# EAGLE board GBADVI (EAGLE 9.6.2)
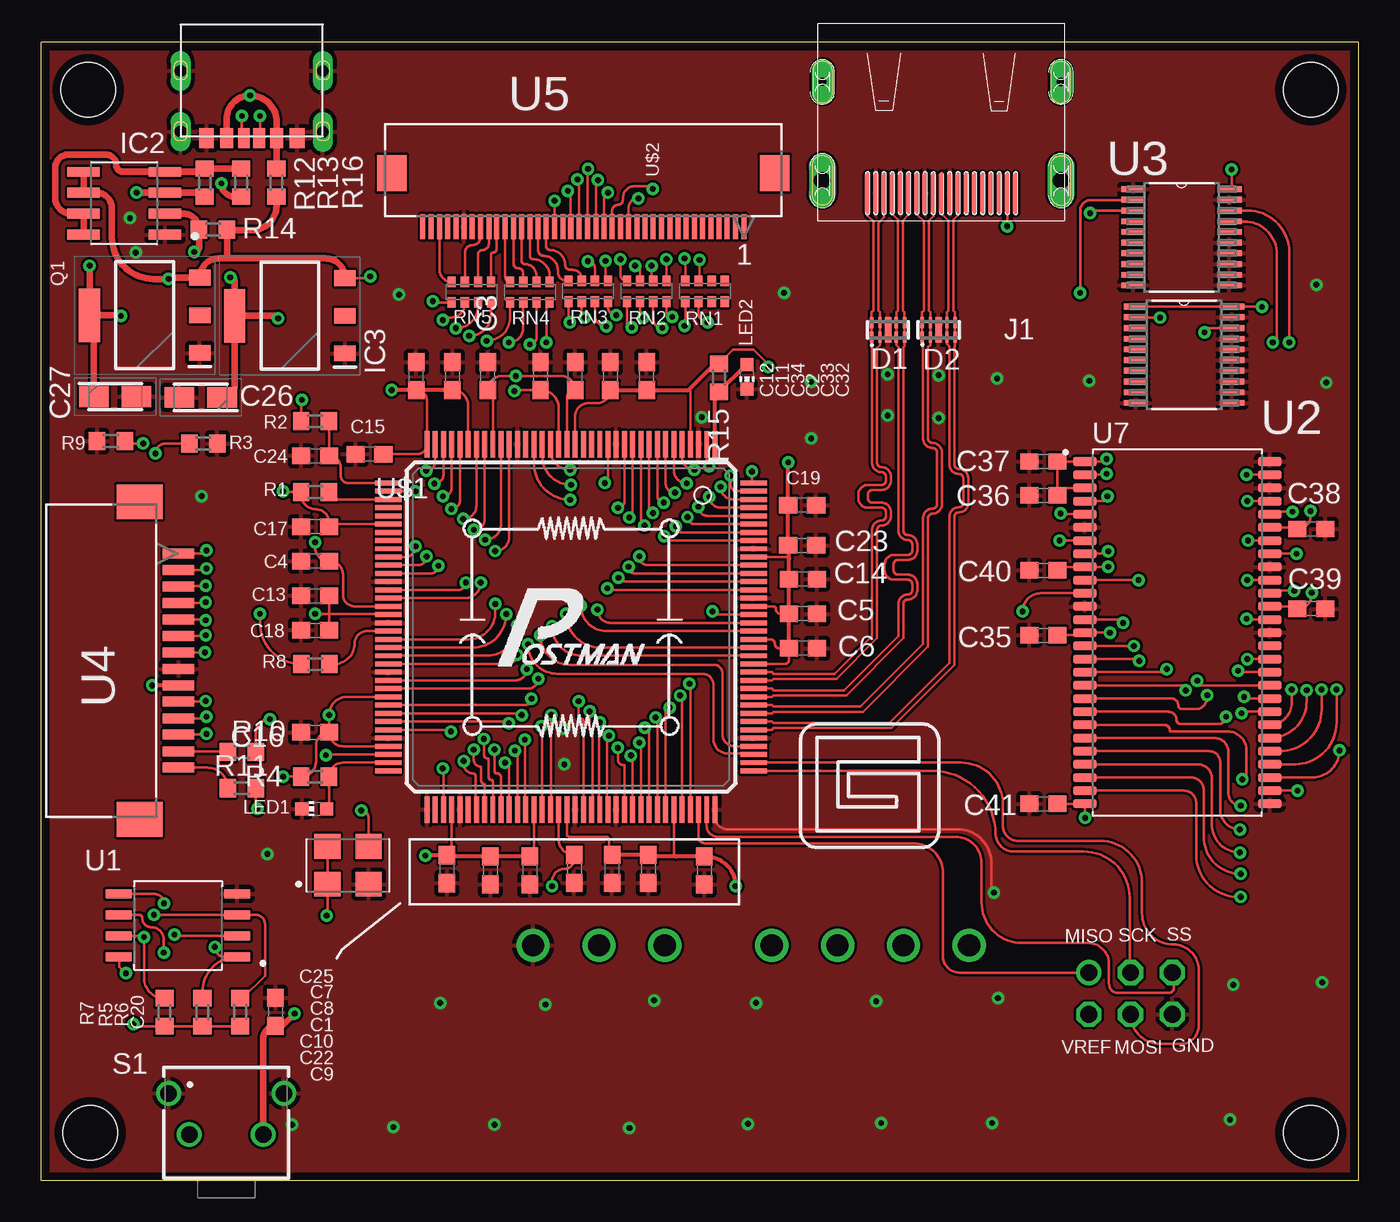
[diagram p0: board, top side]
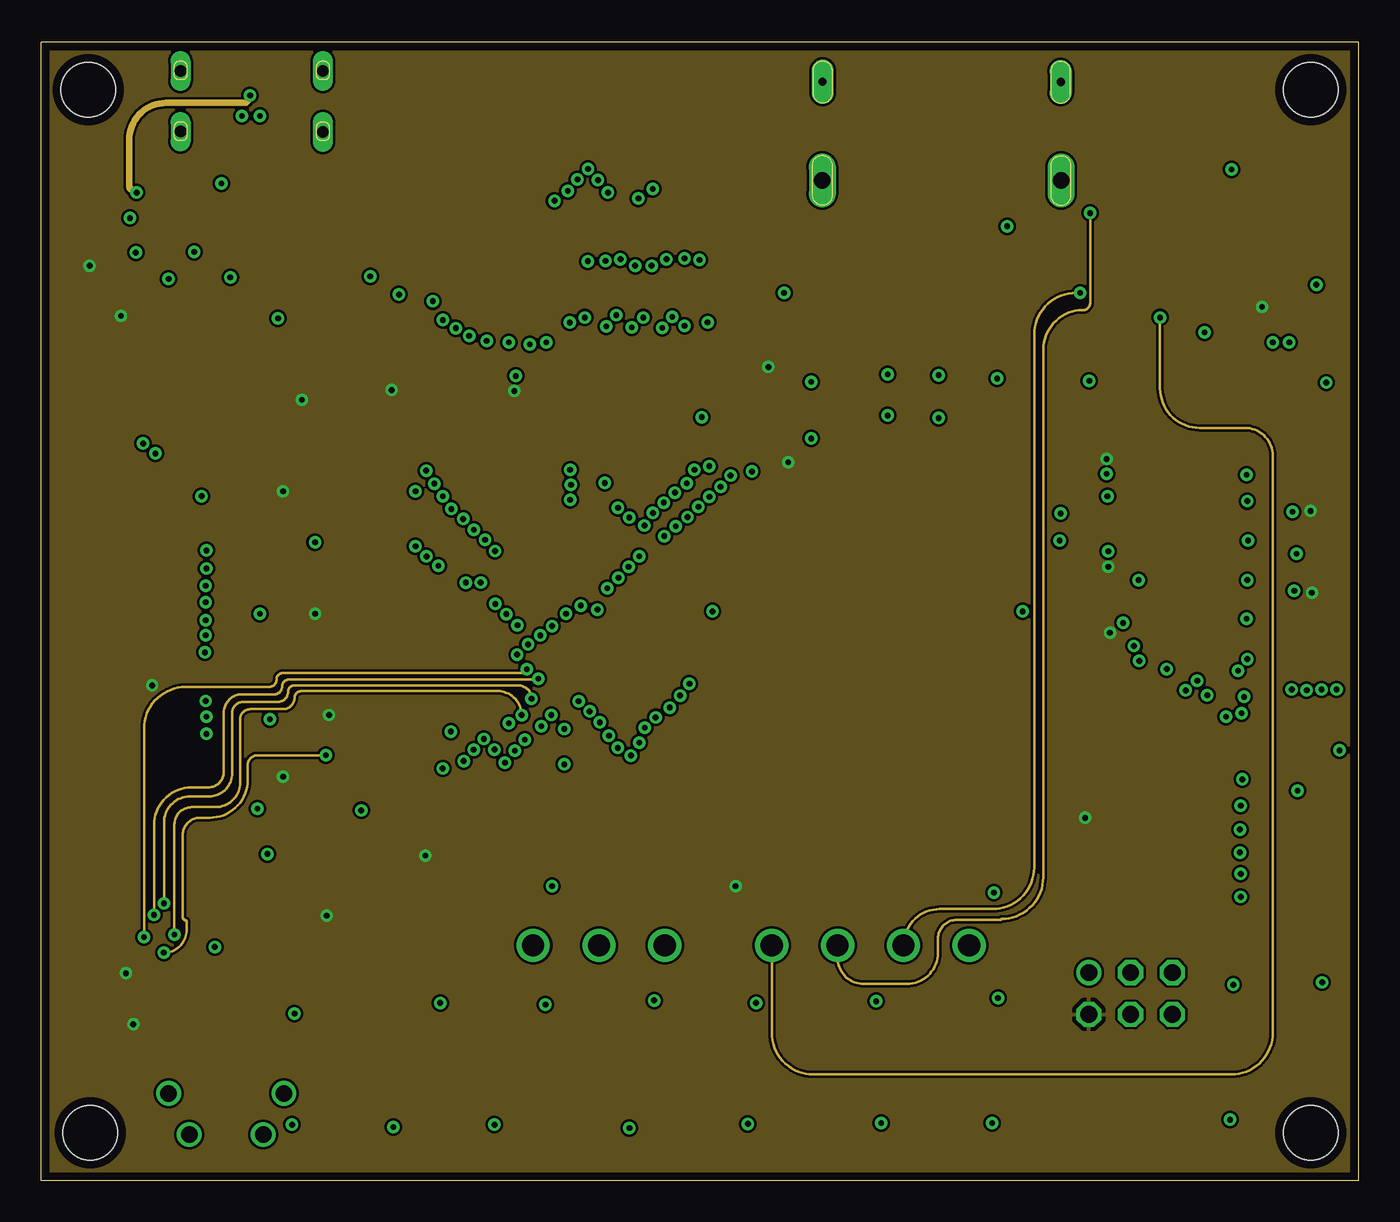
[diagram p1: board, inner layer Route2]
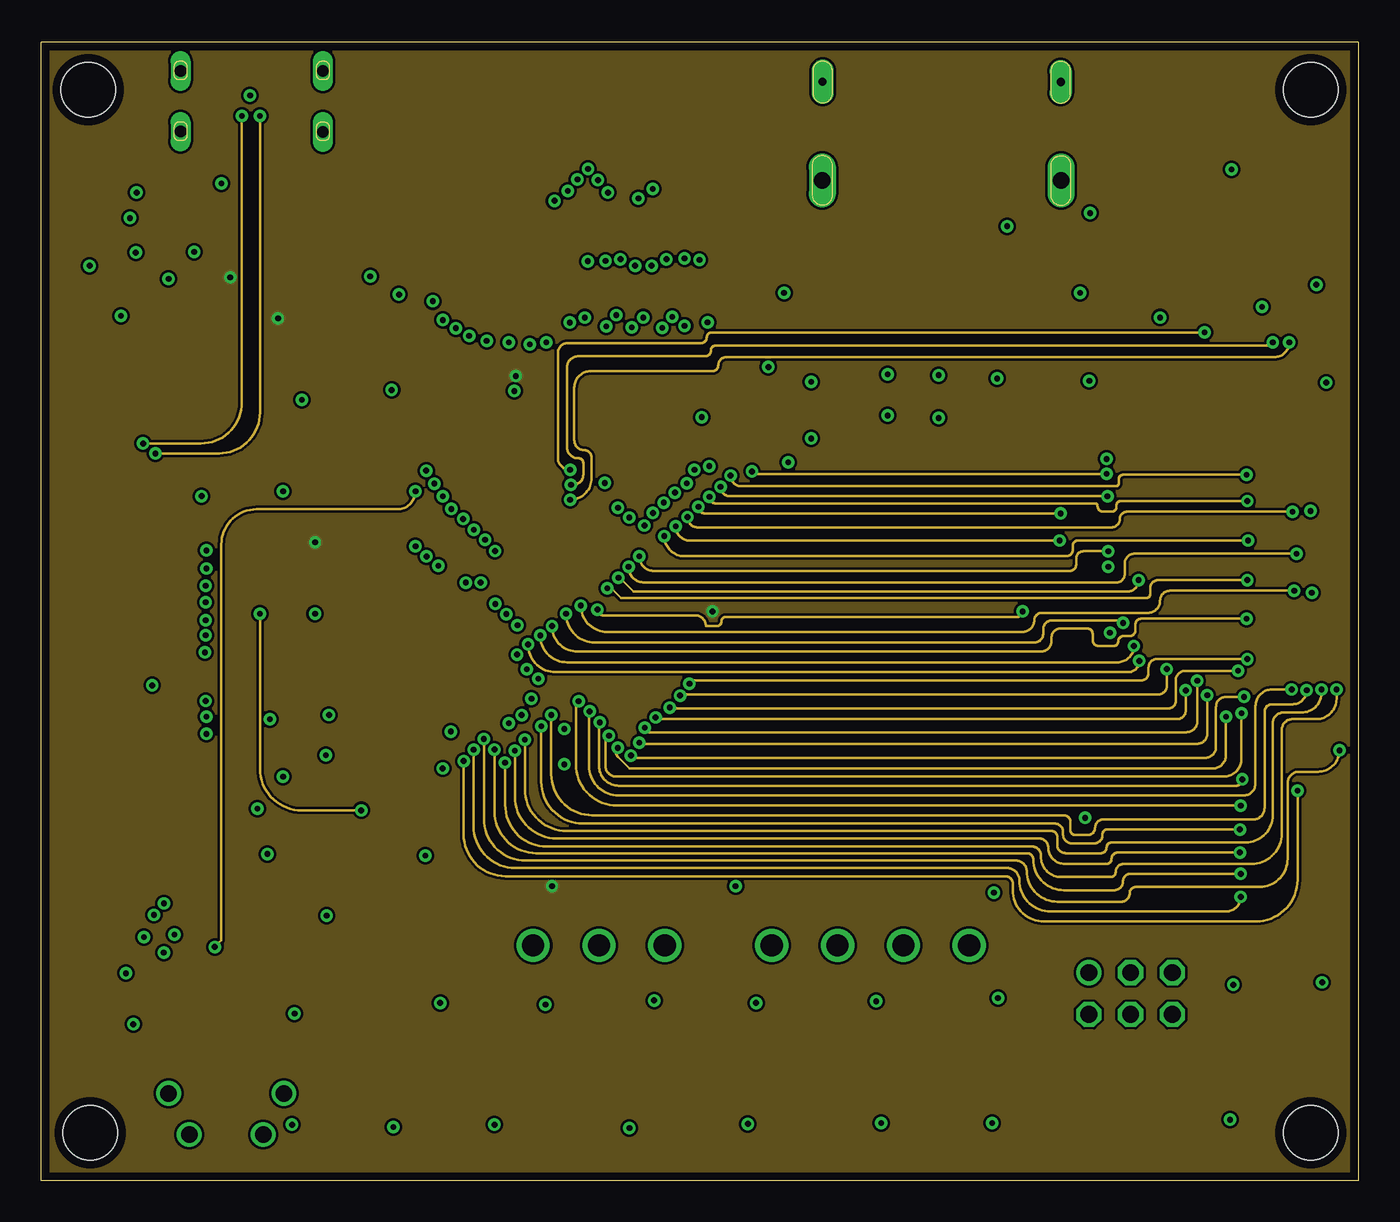
[diagram p2: board, inner layer Route15]
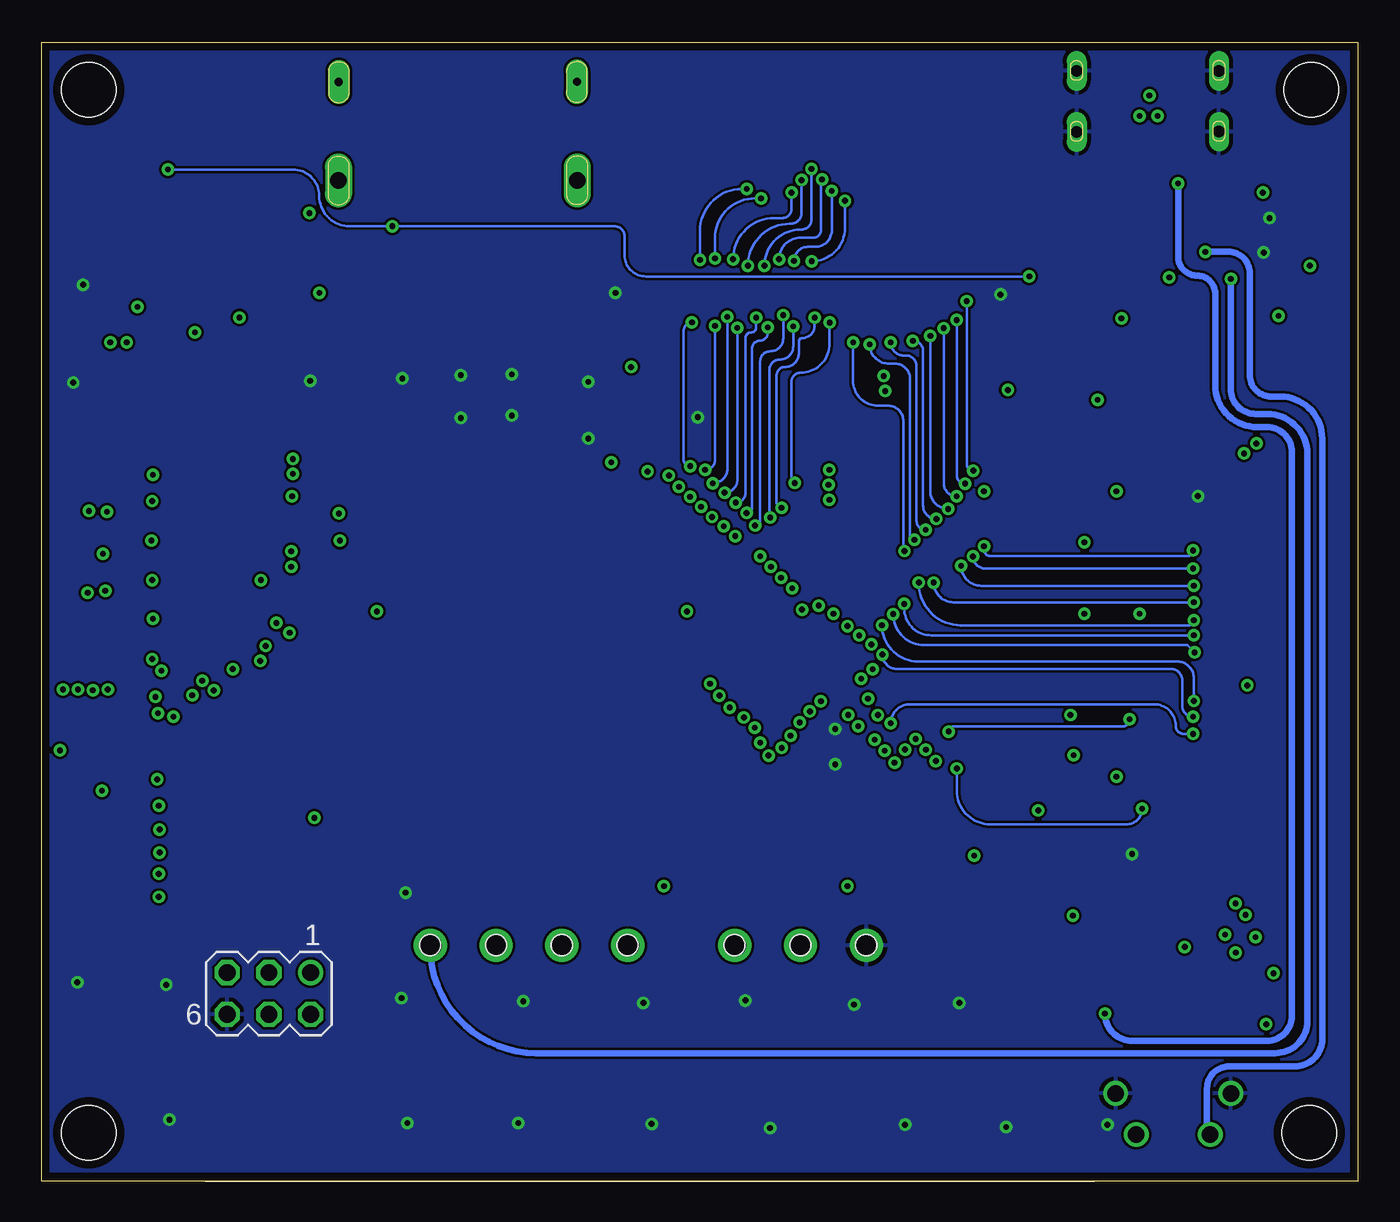
[diagram p3: board, bottom side, seen from below]

Size 80.05 x 69.2 mm. Coordinates in mm from the lower left corner, seen from the top.
Outline: 80.05,69.2 80.05,0 0,0 0,69.2 80.05,69.2
Copper layers (1+2*15+16): Top 0.035mm / dielectric 10mil / Route2 0.035mm / dielectric 40mil / Route15 0.035mm / dielectric 10mil / Bottom 0.035mm
Design rules "default *": minimum track width 6mil, minimum drill 0.35mm, track to track 6mil, track to pad 6mil, pad to pad 6mil, via to via 6mil, smd to smd 6mil, copper to edge 20mil, drill to drill 5mil, minimum pad ring 10mil, minimum via ring 8mil, stop-mask expansion 4mil, vias tented up to drill 35mil, thermal gap 10mil

## Footprints (pad centres in the part's own frame; a part is rotated, then mirrored left to right if it is on the bottom)
C0603 = smd 1.1 x 1: 1 -0.85,0; 2 0.85,0
CAPPM3216X180N = smd 1.8 x 1.25: 1 -1.3,0; 2 1.3,0
RCLAMP0524P = smd 0.2 x 0.675: 1 -1.5,-0.438; 2 -1,-0.438; 4 0,-0.438; 5 0.5,-0.438; 6 0.5,0.438; 7 0,0.438; 9 -1,0.438; 10 -1.5,0.438 | smd 0.4 x 0.775: 3 -0.5,-0.388; 8 -0.5,0.388
SOT229P700X180-4N = smd 1.3 x 0.95: 1 -3.35,2.29; 2 -3.35,0; 3 -3.35,-2.29 | smd 1.3 x 3.25: 4 3.35,0
HDMI-001 = smd 0.3 x 2.6: P$1 -0.07,0.08; P$2 -0.58,0.08; P$3 -1.07,0.08; P$4 -1.57,0.08; P$5 -2.07,0.08; P$6 -2.57,0.08; P$7 -3.07,0.08; P$8 -3.57,0.08; P$9 -4.07,0.08; P$10 -4.57,0.08; P$11 -5.07,0.08; P$12 -5.57,0.08; P$13 -6.07,0.08; P$14 -6.57,0.08; P$15 -7.07,0.08; P$16 -7.57,0.08; P$17 -8.07,0.08; P$18 -8.57,0.08; P$19 -9.07,0.09 | drill 1 pad 1.65 long: P$20 -11.83,-0.7; P$21 2.68,-0.7 | drill 0.5 pad 1.35 long: P$22 -11.82,-6.68; P$23 2.66,-6.69
CHIP-LED0603 = smd 0.8 x 0.8: A 0,-0.75; C 0,0.75
MA03-2 = drill 1.016: 1 -2.54,-1.27 | drill 1.016 octagon: 2 -2.54,1.27; 3 0,-1.27; 4 0,1.27; 5 2.54,-1.27; 6 2.54,1.27
SOIC127P600X175-8N = smd 1.97 x 0.6: 1 -2.475,1.905; 2 -2.475,0.635; 3 -2.475,-0.635; 4 -2.475,-1.905; 5 2.475,-1.905; 6 2.475,-0.635; 7 2.475,0.635; 8 2.475,1.905
R0603 = smd 1 x 1.1: 1 -0.85,0; 2 0.85,0
0603-ARV = smd 0.5 x 0.65: 1 -1.2,-0.625; 2 -0.4,-0.625; 3 0.4,-0.625; 4 1.2,-0.625; 5 1.2,0.625; 6 0.4,0.625; 7 -0.4,0.625; 8 -1.2,0.625
4312560387X6 = drill 1: 1 -3.5,1.25; 2 -2.25,-1.25; 3 2.25,-1.25; 4 3.5,1.25
SOIC127P790X216-8N = smd 1.61 x 0.58: 1 -3.605,1.905; 2 -3.605,0.635; 3 -3.605,-0.635; 4 -3.605,-1.905; 5 3.605,-1.905; 6 3.605,-0.635; 7 3.605,0.635; 8 3.605,1.905
SOP65P640X120-20N = smd 1.473 x 0.356: 1 -2.921,2.921; 2 -2.921,2.286; 3 -2.921,1.626; 4 -2.921,0.965; 5 -2.921,0.33; 6 -2.921,-0.33; 7 -2.921,-0.965; 8 -2.921,-1.626; 9 -2.921,-2.286; 10 -2.921,-2.921; 11 2.921,-2.921; 12 2.921,-2.286; 13 2.921,-1.626; 14 2.921,-0.965; 15 2.921,-0.33; 16 2.921,0.33; 17 2.921,0.965; 18 2.921,1.626; 19 2.921,2.286; 20 2.921,2.921
MOLEX_52271-1469 = smd 0.61 x 1.905: 1 6.502,4.699; 2 5.512,4.699; 3 4.496,4.699; 4 3.505,4.699; 5 2.489,4.699; 6 1.499,4.699; 7 0.508,4.699; 8 -0.508,4.699; 9 -1.499,4.699; 10 -2.489,4.699; 11 -3.505,4.699; 12 -4.496,4.699; 13 -5.512,4.699; 14 -6.502,4.699 | smd 2.108 x 2.794: 15 -9.652,7.061; 16 9.652,7.061
HIROSE_FH12A-40S-0.5SH(55) = smd 0.305 x 1.499: 1 9.754,3.429; 2 9.246,3.429; 3 8.738,3.429; 4 8.255,3.429; 5 7.747,3.429; 6 7.239,3.429; 7 6.756,3.429; 8 6.248,3.429; 9 5.74,3.429; 10 5.258,3.429; 11 4.75,3.429; 12 4.242,3.429; 13 3.759,3.429; 14 3.251,3.429; 15 2.743,3.429; 16 2.261,3.429; 17 1.753,3.429; 18 1.245,3.429; 19 0.762,3.429; 20 0.254,3.429; 21 -0.254,3.429; 22 -0.762,3.429; 23 -1.245,3.429; 24 -1.753,3.429; 25 -2.261,3.429; 26 -2.743,3.429; 27 -3.251,3.429; 28 -3.759,3.429; 29 -4.242,3.429; 30 -4.75,3.429; 31 -5.258,3.429; 32 -5.74,3.429; 33 -6.248,3.429; 34 -6.756,3.429; 35 -7.239,3.429; 36 -7.747,3.429; 37 -8.255,3.429; 38 -8.738,3.429; 39 -9.246,3.429; 40 -9.754,3.429 | smd 1.803 x 2.21: 41 -11.633,6.68; 42 11.633,6.68
SOP80P1176X120-54N = smd 1.44 x 0.55: 1 -5.62,10.4; 2 -5.62,9.6; 3 -5.62,8.8; 4 -5.62,8; 5 -5.62,7.2; 6 -5.62,6.4; 7 -5.62,5.6; 8 -5.62,4.8; 9 -5.62,4; 10 -5.62,3.2; 11 -5.62,2.4; 12 -5.62,1.6; 13 -5.62,0.8; 14 -5.62,0; 15 -5.62,-0.8; 16 -5.62,-1.6; 17 -5.62,-2.4; 18 -5.62,-3.2; 19 -5.62,-4; 20 -5.62,-4.8; 21 -5.62,-5.6; 22 -5.62,-6.4; 23 -5.62,-7.2; 24 -5.62,-8; 25 -5.62,-8.8; 26 -5.62,-9.6; 27 -5.62,-10.4; 28 5.62,-10.4; 29 5.62,-9.6; 30 5.62,-8.8; 31 5.62,-8; 32 5.62,-7.2; 33 5.62,-6.4; 34 5.62,-5.6; 35 5.62,-4.8; 36 5.62,-4; 37 5.62,-3.2; 38 5.62,-2.4; 39 5.62,-1.6; 40 5.62,-0.8; 41 5.62,0; 42 5.62,0.8; 43 5.62,1.6; 44 5.62,2.4; 45 5.62,3.2; 46 5.62,4; 47 5.62,4.8; 48 5.62,5.6; 49 5.62,6.4; 50 5.62,7.2; 51 5.62,8; 52 5.62,8.8; 53 5.62,9.6; 54 5.62,10.4
OSC_ECS-3518-640-B-TR = smd 1.6 x 1.5: 1 -1.25,-1.15; 2 1.25,-1.15; 3 1.25,1.15; 4 -1.25,1.15
TQ144 = smd 1.6 x 0.3: P1 -11.1,8.75; P2 -11.1,8.25; P3 -11.1,7.75; P4 -11.1,7.25; P5 -11.1,6.75; P6 -11.1,6.25; P7 -11.1,5.75; P8 -11.1,5.25; P9 -11.1,4.75; P10 -11.1,4.25; P11 -11.1,3.75; P12 -11.1,3.25; P13 -11.1,2.75; P14 -11.1,2.25; P15 -11.1,1.75; P16 -11.1,1.25; P17 -11.1,0.75; P18 -11.1,0.25; P19 -11.1,-0.25; P20 -11.1,-0.75; P21 -11.1,-1.25; P22 -11.1,-1.75; P23 -11.1,-2.25; P24 -11.1,-2.75; P25 -11.1,-3.25; P26 -11.1,-3.75; P27 -11.1,-4.25; P28 -11.1,-4.75; P29 -11.1,-5.25; P30 -11.1,-5.75; P31 -11.1,-6.25; P32 -11.1,-6.75; P33 -11.1,-7.25; P34 -11.1,-7.75; P35 -11.1,-8.25; P36 -11.1,-8.75; P73 11.1,-8.75; P74 11.1,-8.25; P75 11.1,-7.75; P76 11.1,-7.25; P77 11.1,-6.75; P78 11.1,-6.25; P79 11.1,-5.75; P80 11.1,-5.25; P81 11.1,-4.75; P82 11.1,-4.25; P83 11.1,-3.75; P84 11.1,-3.25; P85 11.1,-2.75; P86 11.1,-2.25; P87 11.1,-1.75; P88 11.1,-1.25; P89 11.1,-0.75; P90 11.1,-0.25; P91 11.1,0.25; P92 11.1,0.75; P93 11.1,1.25; P94 11.1,1.75; P95 11.1,2.25; P96 11.1,2.75; P97 11.1,3.25; P98 11.1,3.75; P99 11.1,4.25; P100 11.1,4.75; P101 11.1,5.25; P102 11.1,5.75; P103 11.1,6.25; P104 11.1,6.75; P105 11.1,7.25; P106 11.1,7.75; P107 11.1,8.25; P108 11.1,8.75 | smd 0.3 x 1.6: P37 -8.75,-11.1; P38 -8.25,-11.1; P39 -7.75,-11.1; P40 -7.25,-11.1; P41 -6.75,-11.1; P42 -6.25,-11.1; P43 -5.75,-11.1; P44 -5.25,-11.1; P45 -4.75,-11.1; P46 -4.25,-11.1; P47 -3.75,-11.1; P48 -3.25,-11.1; P49 -2.75,-11.1; P50 -2.25,-11.1; P51 -1.75,-11.1; P52 -1.25,-11.1; P53 -0.75,-11.1; P54 -0.25,-11.1; P55 0.25,-11.1; P56 0.75,-11.1; P57 1.25,-11.1; P58 1.75,-11.1; P59 2.25,-11.1; P60 2.75,-11.1; P61 3.25,-11.1; P62 3.75,-11.1; P63 4.25,-11.1; P64 4.75,-11.1; P65 5.25,-11.1; P66 5.75,-11.1; P67 6.25,-11.1; P68 6.75,-11.1; P69 7.25,-11.1; P70 7.75,-11.1; P71 8.25,-11.1; P72 8.75,-11.1; P109 8.75,11.1; P110 8.25,11.1; P111 7.75,11.1; P112 7.25,11.1; P113 6.75,11.1; P114 6.25,11.1; P115 5.75,11.1; P116 5.25,11.1; P117 4.75,11.1; P118 4.25,11.1; P119 3.75,11.1; P120 3.25,11.1; P121 2.75,11.1; P122 2.25,11.1; P123 1.75,11.1; P124 1.25,11.1; P125 0.75,11.1; P126 0.25,11.1; P127 -0.25,11.1; P128 -0.75,11.1; P129 -1.25,11.1; P130 -1.75,11.1; P131 -2.25,11.1; P132 -2.75,11.1; P133 -3.25,11.1; P134 -3.75,11.1; P135 -4.25,11.1; P136 -4.75,11.1; P137 -5.25,11.1; P138 -5.75,11.1; P139 -6.25,11.1; P140 -6.75,11.1; P141 -7.25,11.1; P142 -7.75,11.1; P143 -8.25,11.1; P144 -8.75,11.1
SNES_CONT = drill 1.35: 5V 40.35,9.65; CLOCK 36.35,9.65; DATA 28.35,9.65; GND 13.85,9.65; LATCH 32.35,9.65; N/A 17.85,9.65; N/A2 21.85,9.65
USB-C = smd 0.7 x 1.2: CC1 2.3,0.4; CC2 3.24,0.4 | smd 0.9 x 1.2: GND 5.5,0.4; GND1 0,0.4 | drill 0.7 pad 1.16 long: P$7 -1.57,0.01; P$8 7.07,0; P$9 -1.57,-3.69; P$10 7.07,-3.69 | smd 0.8 x 1.2: VCC 4.27,0.4; VCC1 1.23,0.4
STAND-OFF = hole 3.302: 0,0

## Placement (x,y rotation side)
C1  4.7u  [C0603]  32.4,18.95 270 top
C2  4.7u  [C0603]  32.45,48.9 90 top
C3  4.7u  [C0603]  27.15,48.9 90 top
C4  0.47u  [C0603]  16.65,37.65 180 top
C5  0.47U  [C0603]  46.3,34.45 0 top
C6  0.47u  [C0603]  46.3,32.35 0 top
C7  4.7u  [C0603]  27.3,18.85 270 top
C8  0.47U  [C0603]  29.7,18.85 270 top
C9  0.47u  [C0603]  40.3,18.85 270 top
C10  4.7u  [C0603]  34.7,18.95 270 top
C11  4.7u  [C0603]  25,48.9 90 top
C12  4.7u  [C0603]  22.8,48.9 90 top
C13  4.7u  [C0603]  16.65,35.55 180 top
C14  4.7u  [C0603]  46.3,36.55 0 top
C15  4.7u  [C0603]  19.95,44.15 180 top
C16  4.7u  [C0603]  16.65,27.25 180 top
C17  0.47U  [C0603]  16.65,39.75 180 top
C18  0.47u  [C0603]  16.65,33.45 180 top
C19  4.7u  [C0603]  46.25,41.05 0 top
C20  1uF  [C0603]  14.25,10.25 90 top
C22  0.47u  [C0603]  36.9,18.95 270 top
C23  4.7u  [C0603]  46.25,38.6 0 top
C24  0.1u  [C0603]  16.65,44.05 180 top
C25  0.1u  [C0603]  24.66,18.93 270 top
C26  22uF  [CAPPM3216X180N]  9.7,47.6 180 top
C27  22uF  [CAPPM3216X180N]  4.5,47.65 0 top
C32  4.7u  [C0603]  36.8,48.9 90 top
C33  0.47U  [C0603]  34.6,48.9 90 top
C34  0.47u  [C0603]  30.35,48.9 90 top
C35  1uF  [C0603]  60.9,33.15 180 top
C36  1uF  [C0603]  60.9,41.65 180 top
C37  1uF  [C0603]  60.9,43.7 180 top
C38  1uF  [C0603]  77.2,39.6 0 top
C39  1uF  [C0603]  77.2,34.75 0 top
C40  1uF  [C0603]  60.9,37.1 180 top
C41  1uF  [C0603]  60.9,22.9 180 top
D1  RCLAMP0524PQTCT  [RCLAMP0524P]  51.97,51.7 0 top
D2  RCLAMP0524PQTCT  [RCLAMP0524P]  55.04,51.71 0 top
IC2  AMS1117-3.3V  [SOT229P700X180-4N]  6.29,52.59 180 top
IC3  AMS1117-1.2V  [SOT229P700X180-4N]  15.11,52.56 180 top
J1  47151-1081HDMI-001  [HDMI-001]  50.15,60.09 180 top
LED1  [CHIP-LED0603]  16.6,22.6 90 top
LED2  [CHIP-LED0603]  42.9,48.85 180 top
PROG2  [MA03-2]  66.21,11.37 180 bottom
Q1  IRF7319TR  [SOIC127P600X175-8N]  5.05,59.4 180 top
R1  10k  [R0603]  16.65,41.85 0 top
R2  10k  [R0603]  16.65,46.15 0 top
R3  5.1k  [R0603]  9.85,44.8 0 top
R4  2k  [R0603]  16.65,24.55 180 top
R5  10k  [R0603]  9.8,10.23 270 top
R6  10k  [R0603]  12.1,10.25 90 top
R7  10k  [R0603]  7.5,10.23 90 top
R8  22R  [R0603]  16.67,31.39 0 top
R9  5.1k  [R0603]  4.25,44.95 180 top
R10  0R  [R0603]  12.2,26.05 0 top
R11  0R  [R0603]  12.2,23.85 0 top
R12  10k  [R0603]  9.95,60.65 270 top
R13  100k  [R0603]  12.15,60.65 90 top
R14  10k  [R0603]  10.45,57.8 0 top
R15  680R  [R0603]  41.2,48.8 270 top
R16  0R  [R0603]  14.3,60.65 90 top
RN1  [0603-ARV]  40.35,54.05 180 top
RN2  [0603-ARV]  36.8,54.05 0 top
RN3  [0603-ARV]  33.25,54.05 0 top
RN4  [0603-ARV]  29.7,54 0 top
RN5  [0603-ARV]  26.15,54 0 top
S1  431256038726  [4312560387X6]  11.25,4.05 0 top
U1  W25Q64JVSSIQ  [SOIC127P790X216-8N]  8.32,15.51 180 top
U2  SN74LVC245APWR  [SOP65P640X120-20N]  69.45,50.19 0 top
U3  SN74LVC245APWR  [SOP65P640X120-20N]  69.3,57.33 0 top
U4  52271-1469  [MOLEX_52271-1469]  13.05,31.6 90 top
U5  FH12A-40S-0.5SH(55)  [HIROSE_FH12A-40S-0.5SH(55)]  32.95,54.55 0 top
U7  MT48LC16M16A2TG-6A_IT:GTR  [SOP80P1176X120-54N]  69.05,33.3 0 top
U$1  O50327425MEDH4MI  [OSC_ECS-3518-640-B-TR]  18.65,19.16 0 top
U$2  XC6SLX9-2TQG144C  [TQ144]  32.2,33.65 270 top
U$3  SNES_CONT  [SNES_CONT]  16.05,23.95 180 bottom
U$4  [LOGO#JPG]  32.2,33.65 0 top
U$5  POWER_USBC  [USB-C]  15.55,63.75 180 top
U$7  [GAMEBOXCARTBOY]  47.15,21.25 0 top
U$9  [STAND-OFF]  2.97,2.91 90 top
U$10  SNES_CONT  [SNES_CONT]  -5.65,-28.6 0 top  (outside the outline)
U$13  [STAND-OFF]  77.17,2.91 90 top
U$14  [STAND-OFF]  2.87,66.31 90 top
U$15  [STAND-OFF]  77.17,66.31 90 top

## Library data of the parts
C1-C19 C22-C25 C32-C41 = rcl; SPICEPREFIX: C
C20 LED1 LED2 = adafruit
C26 C27 = SamacSys_Parts; DESCRIPTION: Capacitor Tantalum SMT 293D 16V 10uF Vishay 10uF SMD Solid MnO2 Tantalum Electrolytic Capacitor, 16 V dc +/-10%, 293D Series; HEIGHT: 1.8mm; MANUFACTURER_NAME: Vishay; MANUFACTURER_PART_NUMBER: 293D106X9016A2TE3; MOUSER2_PART_NUMBER: 74-293D106X9016A2TE3; MOUSER2_PRICE-STOCK: https://www.mouser.com/Search/Refine.aspx?Keyword=74-293D106X9016A2TE3
D1 D2 = SamacSys_Parts; DESCRIPTION: ESD Suppressors / TVS Diodes 4-LINE, 5V, 0.8PF ESD/SURG; HEIGHT: mm; MANUFACTURER_NAME: SEMTECH; MANUFACTURER_PART_NUMBER: RCLAMP0524PQTCT; MOUSER2_PART_NUMBER: 947-RCLAMP0524PQTCT; MOUSER2_PRICE-STOCK: https://www.mouser.com/Search/Refine.aspx?Keyword=947-RCLAMP0524PQTCT
IC2 IC3 = SamacSys_Parts; DESCRIPTION: 1A LOW DROPOUT VOLTAGE REGULATOR, SOT-223; HEIGHT: 1.8mm; MANUFACTURER_NAME: Advanced Monolithic Systems; MANUFACTURER_PART_NUMBER: ams1117-3.3v
J1 = SamacSys_Parts
PROG2 = con-lstb; OC_FARNELL: unknown; OC_NEWARK: unknown
Q1 = IRF7319TR; AVAILABILITY: Unavailable; DESCRIPTION: Mosfet Array N and P-Channel 30V 2W Surface Mount 8-SO; MF: Infineon Technologies; MP: IRF7319TR; PACKAGE: SOIC-8 Infineon; PRICE: None
R1-R7 R9-R16 = rcl; SPICEPREFIX: R
R8 = resistor
RN1-RN5 = resistor-dil; OC_FARNELL: unknown; OC_NEWARK: unknown
S1 = 431256038726; AVAILABILITY: Warning; DESCRIPTION: Tactile Switch SPST-NO Side Actuated Through Hole, Right Angle; MF: Wurth Electronics; MP: 431256038726; PACKAGE: None; PRICE: None; PURCHASE-URL: https://pricing.snapeda.com/search/part/431256038726/?ref=eda
U1 = W25Q64BVSSIG; AVAILABILITY: Unavailable; DESCRIPTION: FLASH - NOR Memory IC 64Mb _8M x 8_ SPI 80MHz 8-SOIC; MF: Winbond Electronics; MP: W25Q64BVSSIG; PACKAGE: SOIC-8 Winbond; PRICE: None
U2 U3 = SN74LVC245APWR; DESCRIPTION: Octal Bus Transceiver With 3-State Outputs 20-TSSOP -40 to 125; DIGI-KEY_PART_NUMBER: 296-1233-1-ND; DIGI-KEY_PURCHASE_URL: https://www.digikey.com/product-detail/en/texas-instruments/SN74LVC245APWR/296-1233-1-ND/276501?utm_source=snapeda&utm_medium=aggregator&utm_campaign=symbol; MF: Texas Instruments; MP: SN74LVC245APWR; PACKAGE: TSSOP-20 Texas Instruments
U4 = 52271-1469; AVAILABILITY: Good; DESCRIPTION: 14 Position FPC Connector Contacts, Bottom 0.039 (1.00mm) Surface Mount, Right Angle; MF: Molex; MP: 52271-1469; PACKAGE: None; PRICE: None; PURCHASE-URL: https://pricing.snapeda.com/search/part/52271-1469/?ref=eda
U5 = 40pin_0.5mm_Connector; AVAILABILITY: Good; DESCRIPTION: FFC & FPC Connectors 0.5MM 40 POS R/A TOP SMT GLD; MF: Hirose Connector; MP: FH12A-40S-0.5SH(55); PACKAGE: None; PRICE: None; PURCHASE-URL: https://pricing.snapeda.com/search/part/FH12A-40S-0.5SH(55)/?ref=eda
U7 = SRAM_MT48LC16M16A2TG-6A_IT_GTR; AVAILABILITY: Unavailable; DESCRIPTION: SDRAM Memory IC 256Mb (16M x 16) Parallel 167MHz 5.4ns 54-TSOP II; MF: Alliance Memory,; MP: MT48LC16M16A2TG-6A IT:GTR; PACKAGE: TSOP-54 Alliance Memory; PRICE: None
U$1 = SOIC254P1016X440-4N
U$2 = XC6SLX9-2TQG144C; AVAILABILITY: Unavailable; DESCRIPTION: FPGA Spartan®-6 LX Family 9152 Cells 45nm _CMOS_ Technology 1.2V 144-Pin TQFP; MF: Xilinx Inc.; MP: XC6SLX9-2TQG144C; PACKAGE: TQFP-144 Xilinx; PRICE: None
U$3 U$10 = SNES_CONT
U$4 = logo#jpg
U$5 = usbcpower_v1
U$7 = GamboxLogoCartboy
U$9 U$13-U$15 = SparkFun-Electromechanical

## Nets
1V2: C1.1 C2.1 C3.1 C4.1 C26.1 IC3.4 U$2.P19 U$2.P28 U$2.P52 U$2.P89 U$2.P128
3V3: C5.1 C6.1 C7.1 C8.1 C9.1 C10.1 C11.1 C12.1 C13.1 C14.1 C15.1 C16.1 C17.1 C18.1 C19.1 C22.1 C23.1 C25.1 C27.1 C32.1 C33.1 C34.1 C35.1 C36.1 C37.1 C38.1 C39.1 C40.1 C41.1 IC2.4 PROG2.2 R1.1 R2.1 R4.2 R5.2 R6.1 R7.1 R15.1 U1.8 U2.1 U2.20 U4.9 U7.1 U7.3 U7.9 U7.14 U7.27 U7.43 U7.49 U$1.1 U$1.4 U$2.P4 U$2.P18 U$2.P20 U$2.P31 U$2.P36 U$2.P42 U$2.P53 U$2.P63 U$2.P69 U$2.P76 U$2.P86 U$2.P90 U$2.P103 U$2.P122 U$2.P125 U$2.P129 U$2.P135
5V: IC2.3 IC3.3 J1.P$18 Q1.5 Q1.6 R14.2 R16.1 U3.20 U$3.5V
5V_IN: Q1.3 R12.2 R16.2 U$5.VCC U$5.VCC1
A0: U7.23 U$2.P87
A1: U7.24 U$2.P84
A2: U7.25 U$2.P82
A3: U7.26 U$2.P80
A4: U7.29 U$2.P79
A5: U7.30 U$2.P81
A6: U7.31 U$2.P83
A7: U7.32 U$2.P85
A8: U7.33 U$2.P88
A9: U7.34 U$2.P93
A10: U7.22 U$2.P92
A11: U7.35 U$2.P95
A12: U7.36 U$2.P98
A_BUTTON: U4.11 U$2.P59
B1: RN2.4 U$2.P6
B1_GBA: RN2.5 U5.18
B2: RN2.3 U$2.P7
B2_GBA: RN2.6 U5.19
B3: RN2.2 U$2.P8
B3_GBA: RN2.7 U5.20
B4: RN2.1 U$2.P9
B4_GBA: RN2.8 U5.21
B5: RN3.4 U$2.P10
B5_GBA: RN3.5 U5.22
B_BUTTON: U4.12 U$2.P66
BA0: U7.20 U$2.P97
BA1: U7.21 U$2.P94
CAS: U7.17 U$2.P104
CCLK: U1.6 U$2.P70
CKE_RAM: U7.37 U$2.P100
CLK_NES: U3.2 U$3.CLOCK
CLK_NES_FPGA: U3.18 U$2.P23
CLK_RAM: U7.38 U$2.P102
CS: U7.19 U$2.P99
DATA_NES: U2.2 U$3.DATA
DATA_NES_FPGA: U2.18 U$2.P21
DCLK: RN5.1 U$2.P35
DCLK_GBA: RN5.8 U5.38
DOWN_BUTTON: U4.4 U$2.P50
DQ0: U7.2 U$2.P144
DQ1: U7.4 U$2.P142
DQ2: U7.5 U$2.P140
DQ3: U7.7 U$2.P138
DQ4: U7.8 U$2.P134
DQ5: U7.10 U$2.P132
DQ6: U7.11 U$2.P127
DQ7: U7.13 U$2.P124
DQ8: U7.42 U$2.P123
DQ9: U7.44 U$2.P126
DQ10: U7.45 U$2.P131
DQ11: U7.47 U$2.P133
DQ12: U7.48 U$2.P137
DQ13: U7.50 U$2.P139
DQ14: U7.51 U$2.P141
DQ15: U7.53 U$2.P143
DQMH: U7.39 U$2.P105
DQML: U7.15 U$2.P112
FLASH_CS: R5.1 U1.1 U$2.P38
FLASH_D0: U1.5 U$2.P64
FLASH_D1: U1.2 U$2.P65
FLASH_D2: R6.2 U1.3 U$2.P62
FLASH_D3: R7.2 U1.7 U$2.P61
G1: RN3.3 U$2.P11
G1_GBA: RN3.6 U5.24
G2: RN3.2 U$2.P12
G2_GBA: RN3.7 U5.25
G3: RN3.1 U$2.P14
G3_GBA: RN3.8 U5.26
G4: RN4.4 U$2.P26
G4_GBA: RN4.5 U5.27
G5: RN4.3 U$2.P27
G5_GBA: RN4.6 U5.28
GND: C1.2 C2.2 C3.2 C4.2 C5.2 C6.2 C7.2 C8.2 C9.2 C10.2 C11.2 C12.2 C13.2 C14.2 C15.2 C16.2 C17.2 C18.2 C19.2 C20.2 C22.2 C23.2 C24.2 C25.2 C26.2 C27.2 C32.2 C33.2 C34.2 C35.2 C36.2 C37.2 C38.2 C39.2 C40.2 C41.2 D1.3 D1.8 D2.3 D2.8 IC2.1 IC3.1 J1.P$2 J1.P$5 J1.P$8 J1.P$11 LED1.C LED2.C PROG2.6 Q1.1 R3.2 R9.2 S1.1 S1.4 U1.4 U2.10 U2.11 U2.12 U2.13 U2.14 U2.15 U2.16 U2.17 U2.19 U3.1 U3.10 U3.11 U3.12 U3.13 U3.14 U3.15 U3.19 U4.8 U5.35 U7.6 U7.12 U7.28 U7.41 U7.46 U7.52 U7.54 U$1.2 U$2.P3 U$2.P13 U$2.P25 U$2.P49 U$2.P54 U$2.P60 U$2.P68 U$2.P73 U$2.P77 U$2.P91 U$2.P96 U$2.P108 U$2.P113 U$2.P130 U$2.P136 U$3.GND U$5.GND U$5.GND1 U$5.P$7 U$5.P$8 U$5.P$9 U$5.P$10
L_BUTTON: U4.1 U$2.P46
LATCH_NES: U3.3 U$3.LATCH
LATCH_NES_FPGA: U3.17 U$2.P22
LEFT_BUTTON: U4.3 U$2.P48
MISO/TDO: PROG2.1 U$2.P106
MOSI/TDI: PROG2.4 U$2.P110
N$1: R1.2 U$2.P39
N$2: C24.1 R2.2 U$2.P37
N$3: R3.1 U$5.CC1
N$4: R8.1 U$1.3
N$5: R9.1 U$5.CC2
N$6: R10.2 U$2.P67
N$7: R11.2 U$2.P75
N$9: Q1.2 R14.1 S1.2
N$11: Q1.4 Q1.7 Q1.8 R12.1 R13.2
N$12: C20.1 R13.1 S1.3
N$18: U$2.P74
N$19: LED1.A R4.1 U$2.P71
N$20: LED2.A R15.2 U$2.P1
N$24: U$2.P78
OSC_OUT: R8.2 U$2.P55
PWR_FET_5V: U3.4
PWR_SW: U3.16
R1: RN4.2 U$2.P29
R1_GBA: RN4.7 U5.29
R2: RN4.1 U$2.P30
R2_GBA: RN4.8 U5.30
R3: RN5.4 U$2.P32
R3_GBA: RN5.5 U5.31
R4: RN5.3 U$2.P33
R4_GBA: RN5.6 U5.32
R5: RN5.2 U$2.P34
R5_GBA: RN5.7 U5.33
R_BUTTON: U4.10 U$2.P58
RAS: U7.18 U$2.P101
RIGHT_BUTTON: U4.5 U$2.P51
SCK/TCK: PROG2.3 U$2.P109
SCL_HDMI: J1.P$16
SDA_HDMI: J1.P$15
SELECT_BUTTON: U4.6 U$2.P56
SO1: R10.1 U4.13
SO2: R11.1 U4.14
SPL: RN1.6 U$2.P2
SPL_GBA: RN1.3 U5.17
SPS: RN1.5 U$2.P5
SPS_GBA: RN1.4 U5.15
SS/TMS: PROG2.5 U$2.P107
START_BUTTON: U4.7 U$2.P57
TMDSCLK_N: D2.5 D2.6 J1.P$12 U$2.P114
TMDSCLK_P: D2.4 D2.7 J1.P$10 U$2.P115
TMDSD0_N: D2.2 D2.9 J1.P$9 U$2.P116
TMDSD0_P: D2.1 D2.10 J1.P$7 U$2.P117
TMDSD1_N: D1.5 D1.6 J1.P$6 U$2.P118
TMDSD1_P: D1.4 D1.7 J1.P$4 U$2.P119
TMDSD2_N: D1.2 D1.9 J1.P$3 U$2.P120
TMDSD2_P: D1.1 D1.10 J1.P$1 U$2.P121
UP_BUTTON: U4.2 U$2.P47
WE: U7.16 U$2.P111

## Tracks (layer width: path | path; a pad name or v marks a point on that pad's centre or on a via)
1V2  (via drill 0.35)
  Top 0.152: U$2.P128 40.99,34.4 arc-90 v40.8,34.59 | U$2.P89 31.45,20.75 arc90 C1.1 32.4,19.55 arc-90 31.8,18.95 arc90 31.05,18.2 v31.05,17.89 | U$2.P19 31.95,47.55 arc-90 C2.1 arc90 31.6,48.9 v28.85,48.9 28,48.9 arc90 C3.1 arc-90 27.45,47.75 U$2.P28 | U$2.P52 19.05,34.9 arc-90 18.35,35.6 18.35,36.8 arc90 C4.1 arc-90 16.65,38.5 v16.65,38.8
  Top 0.406: IC3.4 11.76,48.36 arc-90 C26.1 | IC3.4 14.24,52.56 arc-90 v14.4,52.4 | IC3.4 11.76,54.63 arc90 v11.49,54.9
  pour Route15: -5.65,71.2 87.95,71.2 87.95,-4.45 -5.65,-4.45
3V3  (via drill 0.35)
  Top 0.152: v64.75,43.86 arc-90 64.59,43.7 U7.1 C37.1 C36.1 arc-90 62.2,42.1 U7.3 | C40.1 arc-90 61.95,37.3 U7.9 v64.85,37.3 | C35.1 63.28,33.15 arc90 U7.14 v64.95,33.3 | C41.1 U7.27 63.43,22.07 arc90 v63.45,22.05 | U7.43 76.2,34.9 arc-90 C39.1 arc90 77.22,35.62 v77.22,35.73 | U7.49 76.25,39.7 arc-90 C38.1 arc90 77.15,40.4 v77.15,40.7 | U$2.P90 31.95,21.05 arc90 32.1,20.9 34.35,20.9 arc-90 34.5,20.75 34.5,20 arc90 C10.1 | 38.6,19.7 arc-90 38.45,19.85 U$2.P103 | C8.1 arc90 29.95,19.95 U$2.P86 | C25.1 arc90 24.95,20.07 U$2.P76 | U$2.P135 45.35,37.9 arc-90 45.45,37.8 | C5.1 44.95,34.45 arc-90 44.65,34.75 arc90 44.5,34.9 U$2.P129 | U$2.P125 44.3,32.9 arc-90 44.6,32.6 arc90 44.85,32.35 C6.1 45.45,31.65 arc-90 45.2,31.4 U$2.P122 | U$2.P20 31.45,46.95 arc90 C34.1 28.81,48.05 arc90 v28.75,47.99 | C12.1 arc-90 23.45,47.4 U$2.P36 arc-90 22.85,44.15 C15.1 | C11.1 arc-90 25.95,47.1 U$2.P31 | C33.1 arc-90 33.8,47.25 33.25,47.25 arc90 32.45,46.45 U$2.P18 | 39.35,48.05 arc-90 39.45,47.95 U$2.P4 | C16.1 arc90 18.35,26.4 U$2.P69 | C16.1 arc90 16.7,26.45 16.7,25.45 arc-90 R4.2 v14.7,24.55 | C16.1 v17.5,28.3 arc-90 18.6,29.4 U$2.P63 | U$2.P53 21.05,34.45 17.5,34.45 | C13.1 17.5,34.45 | 17.5,34.45 C18.1 17.5,34.4 arc90 17.45,34.45 v16.65,34.45 | U$2.P42 17.65,39.9 arc90 C17.1 17.5,40 arc90 16.7,40.8 arc-90 15.8,41.7 R1.1 14.75,41.85 arc-90 v14.7,41.9 | R2.1 15.8,47.4 arc-90 v15.85,47.45 | U1.8 4.75,13.57 4.75,13 v5.15,12.6 | R6.1 arc-90 12.08,9.38 R5.2 R7.1 5.72,9.38 arc-90 v5.6,9.5 | U$1.4 U$1.1 17.4,16.15 arc-90 v17.35,16.1 | U2.1 U2.20 74.19,53.11 arc-90 v74.2,53.1 | R15.1 42.05,50.5 43.3,50.5 44.2,49.6 v44.2,49.44
  Top 0.254: C10.1 C22.1 37,19.7 38.6,19.7 C9.1 40.39,19.7 arc-90 v42.2,17.89 | C8.1 C7.1 24.74,19.7 C25.1 23.38,19.78 v23.35,19.75 | C6.1 C5.1 C14.1 45.45,37.8 45.45,38.55 arc90 C23.1 C19.1 v45.4,43.65 | C11.1 C12.1 v21.3,48.05 | C33.1 C32.1 39.35,48.05 40.95,49.65 R15.1 | U4.9 v6.75,30.1 arc90 v6.75,30.1
  Top 0.406: IC2.4 arc-90 3.2,52.33 C27.1 | IC2.4 v2.94,55.59 arc-90 v2.95,55.6 | IC2.4 4.81,52.59 arc-90 v4.85,52.55
  pour Route2: -4.4,70.65 88.1,70.65 88.1,-1.35 -4.4,-1.35
5V  (via drill 0.35)
  Top 0.152: IC3.3 19.9,54.85 arc90 v20,54.95 | v72.35,61.45 72.35,60.38 arc-90 U3.20 | v58.7,58 58.72,58.02 J1.P$18
  Top 0.406: 11.3,56.05 R14.2 arc90 11.35,57.75 12.8,57.75 arc90 14.3,59.25 R16.1 | 11.3,56.05 10.81,56.05 arc90 IC2.3 7.83,54.88 arc90 v7.75,54.8 6.84,54.8 arc-90 4.3,57.34 4.3,59.1 arc90 3.37,60.03 Q1.6 Q1.5 | 11.3,56.05 17.26,56.05 arc-90 IC3.3
  Bottom 0.152: v20,54.95 43.3,54.95 arc90 44.6,56.25 44.6,57.4 arc-90 45.2,58 v58.7,58 61.3,58 arc90 63.15,59.85 arc-90 64.75,61.45 v72.35,61.45
  Bottom 0.406: v7.75,54.8 7.75,48.1 arc-90 6.25,46.6 5.54,46.6 arc90 3.1,44.16 3.1,9.69 arc90 5.04,7.75 49.96,7.75 arc90 56.4,14.19 U$3.5V
5V_IN  (via drill 0.35)
  Top 0.406: U$5.VCC1 arc-90 14.3,63.37 arc-90 U$5.VCC1 | U$5.VCC1 14.32,64.33 arc90 v12.7,65.95 arc90 11.28,64.53 U$5.VCC | v5.8,60.05 7.51,60.05 arc-90 Q1.3 9.71,60.03 arc-90 R12.2 | U$5.VCC1 14.32,61.52 arc-90 R16.2
  Route2 0.406: v12.7,65.95 arc90 12.7,65.75 12.45,65.5 7.6,65.5 arc90 5.35,63.25 5.35,60.5 arc90 v5.8,60.05
A0  (via drill 0.35)
  Top 0.152: U7.23 71,26.1 arc-90 71.65,25.45 71.65,22.54 arc90 v72.85,21.34 | v30.39,27.62 arc-90 30.45,27.57 U$2.P87
  Route15 0.152: v72.85,21.34 64.79,21.34 arc90 64.5,21.05 64.5,21 arc-90 64,20.5 62.65,20.5 arc-90 62.1,21.05 62.1,21.2 arc90 61.6,21.7 32.93,21.7 arc-90 30.39,24.24 v30.39,27.62
A1  (via drill 0.35)
  Top 0.152: U7.24 70.3,25.3 arc-90 71.15,24.45 71.15,21.64 arc90 v72.85,19.94 | v28.79,26.12 arc-90 28.95,25.96 U$2.P84
  Route15 0.152: v72.85,19.94 65.44,19.94 arc90 65.05,19.55 arc-90 64.75,19.25 62.2,19.25 arc-90 61.2,20.25 arc90 60.65,20.8 31.33,20.8 arc-90 28.79,23.34 v28.79,26.12
A2  (via drill 0.35)
  Top 0.152: U7.25 69.9,24.5 arc-90 70.65,23.75 70.65,20.89 arc90 v72.9,18.64 | v27.55,26.2 27.55,24.9 arc90 27.7,24.75 arc-90 27.95,24.5 U$2.P82
  Route15 0.152: v72.9,18.64 66.19,18.64 arc90 65.75,18.2 arc-90 65.2,17.65 62.15,17.65 arc-90 60.3,19.5 arc90 59.9,19.9 30.09,19.9 arc-90 27.55,22.44 v27.55,26.2
A3  (via drill 0.35)
  Top 0.152: U7.26 69.45,23.7 arc-90 70.2,22.95 70.2,19.78 arc90 72.74,17.24 v72.9,17.24 | v26.28,26.18 26.28,25.62 arc90 26.75,25.15 26.75,24.3 arc90 26.95,24.1 U$2.P80
  Route15 0.152: v72.9,17.24 arc-90 72.01,16.35 61.35,16.35 arc-90 59.45,18.25 arc90 58.7,19 28.82,19 arc-90 26.28,21.54 v26.28,26.18
A4  (via drill 0.35)
  Top 0.152: U7.29 v76.36,23.7 | v25.68,25.5 25.68,25.32 arc90 26.25,24.75 arc-90 26.4,24.6 26.4,22.6 arc90 U$2.P79
  Route15 0.152: v76.36,23.7 76.36,18.29 arc-90 73.82,15.75 60.95,15.75 arc-90 59.05,17.65 59.05,18.05 arc90 58.6,18.5 28.22,18.5 arc-90 25.68,21.04 v25.68,25.5
A5  (via drill 0.35)
  Top 0.152: U7.30 77.25,24.5 arc90 v78.9,26.15 | v26.91,26.84 26.91,25.89 arc90 27.15,25.65 arc-90 27.2,25.6 27.2,24.5 arc90 27.35,24.35 arc-90 27.45,24.25 U$2.P81
  Route15 0.152: v78.9,26.15 arc-90 77.6,24.85 76.45,24.85 arc90 75.75,24.15 75.75,19.55 arc-90 74.05,17.85 66.55,17.85 arc90 66.15,17.45 arc-90 65.65,16.95 61.75,16.95 arc-90 59.9,18.8 arc90 59.25,19.45 29.45,19.45 arc-90 26.91,21.99 v26.91,26.84
A6  (via drill 0.35)
  Top 0.152: U7.31 76.19,25.3 arc90 78.73,27.84 v78.73,29.85 | v28.19,25.4 arc-90 28.45,25.14 U$2.P83
  Route15 0.152: v78.73,29.85 78.73,29.28 arc-90 77.5,28.05 76.05,28.05 arc90 75.4,27.4 75.4,21.1 arc-90 73.55,19.25 65.8,19.25 arc90 65.3,18.75 arc-90 65,18.45 62,18.45 arc-90 60.75,19.7 60.75,19.8 arc90 60.25,20.3 30.74,20.3 arc-90 28.2,22.84 28.2,25.39 arc90 v28.19,25.4
A7  (via drill 0.35)
  Top 0.152: U7.32 75.28,26.1 arc90 77.82,28.64 v77.82,29.85 | v29.4,26.8 29.4,22.6 arc90 U$2.P85
  Route15 0.152: v77.82,29.85 77.82,29.67 arc-90 76.6,28.45 75.5,28.45 arc90 74.85,27.8 74.85,22.2 arc-90 73.2,20.55 65.05,20.55 arc90 64.75,20.25 arc-90 64.4,19.9 62.25,19.9 arc-90 61.75,20.4 61.75,20.9 arc90 61.4,21.25 31.94,21.25 arc-90 29.4,23.79 v29.4,26.8
A8  (via drill 0.35)
  Top 0.152: U7.33 arc90 76.91,29.14 v76.91,29.8 | U$2.P88 31,22.6 v31,28.3
  Route15 0.152: v76.91,29.8 arc-90 76.06,28.95 74.8,28.95 arc90 74.35,28.5 74.35,22.65 arc-90 73.65,21.95 64.55,21.95 arc90 64.05,21.45 arc-90 63.6,21 62.85,21 arc-90 62.55,21.3 62.55,21.8 arc90 62.15,22.2 33.49,22.2 arc-90 31,24.69 v31,28.3
A9  (via drill 0.35)
  Top 0.152: U7.34 arc90 76,29.03 v76,29.85 | v33.33,28.52 33.33,27.47 arc90 33.5,27.3 33.5,22.6 arc-90 U$2.P93
  Route15 0.152: v76,29.85 74.8,29.85 arc90 73.8,28.85 73.8,24.15 arc-90 73.05,23.4 35.1,23.4 arc-90 33.3,25.2 33.3,28.48 arc-90 v33.33,28.52
A10  (via drill 0.35)
  Top 0.152: U7.22 71.3,26.9 arc-90 72.15,26.05 72.15,23.54 arc90 v72.9,22.79 | v32.66,29.14 32.66,28.23 arc90 32.85,28.05 arc-90 32.95,27.95 U$2.P92
  Route15 0.152: v72.9,22.79 35.01,22.79 arc-90 32.5,25.3 32.5,28.97 arc-90 v32.66,29.14
A11  (via drill 0.35)
  Top 0.152: U7.35 73.05,28.5 arc90 v72.95,28.4 | v34.51,27.04 arc90 34.4,26.93 34.4,22.6 U$2.P95
  Route15 0.152: v72.95,28.4 72.95,25.65 arc-90 71.85,24.55 34.95,24.55 arc-90 34.3,25.2 34.3,26.84 arc-90 v34.51,27.04
A12  (via drill 0.35)
  Top 0.152: U7.36 73.2,29.3 arc-90 v73.1,29.4 | v35.84,25.84 arc-90 35.95,25.73 U$2.P98
  Route15 0.152: v73.1,29.4 72,29.4 arc90 71.4,28.8 71.4,26.35 arc-90 70.75,25.7 35.98,25.7 arc-90 v35.84,25.84
A_BUTTON  (via drill 0.35)
  Top 0.152: U4.11 9.95,28.09 arc90 v10.05,28.2 | v28.92,31.97 arc-90 28.35,31.4 U$2.P59
  Bottom 0.152: v10.05,28.2 arc90 10.7,28.85 10.7,30.4 arc-90 11.4,31.1 28.05,31.1 arc90 v28.92,31.97
B1  (via drill 0.35)
  Top 0.152: RN2.4 38,52.85 arc90 v38.35,52.5 | v39.23,42.38 arc-90 38.45,43.16 U$2.P6
  Bottom 0.152: v38.35,52.5 38.35,43.27 arc90 v39.23,42.38
B1_GBA  (via drill 0.35)
  Top 0.152: U5.18 34.2,59.8 arc-90 v34.45,60.05 | v38,56 RN2.5
  Bottom 0.152: v34.45,60.05 34.45,59.05 arc90 35,58.5 35.5,58.5 arc-90 v38,56
B2  (via drill 0.35)
  Top 0.152: RN2.3 37.2,52.37 arc90 v37.74,51.82 | v38.52,41.81 arc-90 37.95,42.38 U$2.P7
  Bottom 0.152: v37.74,51.82 37.74,42.59 arc90 v38.52,41.81
B2_GBA  (via drill 0.35)
  Top 0.152: U5.19 33.71,60.68 arc-90 v33.84,60.81 | v37.1,55.6 37.1,54.77 arc90 RN2.6
  Bottom 0.152: v33.84,60.81 33.84,58.81 arc90 34.5,58.15 34.56,58.15 arc-90 v37.1,55.61 v37.1,55.6
B3  (via drill 0.35)
  Top 0.152: RN2.2 36.4,52.64 arc90 v36.59,52.45 | v37.84,41.21 arc-90 37.45,41.59 U$2.P8
  Bottom 0.152: v36.59,52.45 36.59,51.86 arc90 36.9,51.55 arc-90 37.25,51.2 37.25,41.79 arc90 v37.84,41.21
B3_GBA  (via drill 0.35)
  Top 0.152: U5.20 33.2,61.45 arc-90 v33.23,61.48 | v36.1,55.6 arc-90 36.4,55.3 RN2.7
  Bottom 0.152: v33.23,61.48 33.23,58.41 arc90 33.85,57.8 33.9,57.8 arc-90 v36.1,55.6
B4  (via drill 0.35)
  Top 0.152: RN2.1 35.6,52.15 arc90 v35.9,51.85 | v37.18,40.58 arc-90 36.95,40.81 U$2.P9
  Bottom 0.152: v35.9,51.85 35.9,51.5 arc90 36.35,51.05 arc-90 36.85,50.55 36.85,40.91 arc90 v37.18,40.58
B4_GBA  (via drill 0.35)
  Top 0.152: U5.21 32.7,60.74 arc90 v32.59,60.84 | v35.21,56 35.21,55.07 arc90 RN2.8
  Bottom 0.152: v32.59,60.84 arc-90 32.65,60.78 32.65,57.8 arc90 33.15,57.3 33.91,57.3 arc-90 v35.21,56
B5  (via drill 0.35)
  Top 0.152: RN3.4 34.45,53.1 arc90 v34.95,52.6 | v36.66,39.81 arc-90 36.45,40.02 U$2.P10
  Bottom 0.152: v34.95,52.6 34.95,51.2 arc90 35.75,50.4 arc-90 36.35,49.8 36.35,40.12 arc90 v36.66,39.81
B5_GBA  (via drill 0.35)
  Top 0.152: U5.22 32.19,59.96 arc90 v32,60.15 | v34.3,55.9 34.3,54.83 arc90 RN3.5
  Bottom 0.152: v32,60.15 32,57.75 arc90 33,56.75 33.45,56.75 arc-90 v34.3,55.9
B_BUTTON  (via drill 0.35)
  Top 0.152: U4.12 10,27.1 arc90 v10.05,27.15 | v28.41,27.79 arc90 28.31,27.9 U$2.P66
  Bottom 0.152: v10.05,27.15 10.6,27.15 arc90 11.1,27.65 arc-90 12.4,28.95 27.26,28.95 arc-90 v28.41,27.79
BA0  (via drill 0.35)
  Top 0.152: U7.20 68.5,28.5 arc-90 69,28 arc90 69.25,27.75 71.56,27.75 arc90 v72.01,28.19 | v35.05,26.3 35.05,25.6 arc90 35.4,25.25 arc-90 35.45,25.2 U$2.P97
  Route15 0.152: v72.01,28.19 72.01,25.86 arc-90 71.2,25.05 35.75,25.05 35.05,25.75 arc-90 v35.05,26.3
BA1  (via drill 0.35)
  Top 0.152: U7.21 68.25,27.7 arc-90 68.6,27.35 arc90 68.65,27.3 72.1,27.3 arc-90 73.25,26.15 73.25,24.64 arc-90 v73,24.38 | v33.95,27.85 arc90 33.9,27.8 33.9,22.6 arc90 U$2.P94
  Route15 0.152: v73,24.38 arc-90 72.61,24 35.1,24 arc-90 33.9,25.2 33.9,27.8 v33.95,27.85
CAS  (via drill 0.35)
  Top 0.152: U7.17 68.21,30.9 arc90 v68.41,31.09 | v38.83,29.48 arc-90 38.95,29.36 U$2.P104
  Route15 0.152: v68.41,31.09 68.41,30.06 arc-90 67.9,29.55 38.95,29.55 38.88,29.48 arc90 v38.83,29.48
CCLK  (via drill 0.35)
  Top 0.152: U$2.P70 17.36,25.9 arc90 v17.31,25.85 | v7.45,13.85 7.45,14.65 arc90 6.7,15.4 arc-90 6.15,15.95 arc90 5.96,16.14 U1.6
  Route2 0.152: v17.31,25.85 13.15,25.85 arc90 12.55,25.25 12.55,24.35 arc-90 10.25,22.05 9.65,22.05 arc90 8.6,21 8.6,16.05 arc90 8.85,15.8 8.85,15.25 arc-90 v7.45,13.85
CKE_RAM  (via drill 0.35)
  Top 0.152: U7.37 70.53,30.1 arc-90 v70.26,30.38 | v36.68,27.53 arc-90 36.95,27.26 U$2.P100
  Route15 0.152: v70.26,30.38 70.26,27.91 arc-90 69.6,27.25 36.96,27.25 arc-90 v36.68,27.53
CLK_NES  (via drill 0.35)
  Top 0.152: v63.14,53.96 63.14,58.94 arc-90 63.8,59.6 66.36,59.6 arc90 U3.2
  Route2 0.152: v63.14,53.96 62.89,53.96 arc90 60.35,51.42 60.35,19.04 arc-90 57.81,16.5 54.6,16.5 arc90 U$3.CLOCK
CLK_NES_FPGA  (via drill 0.35)
  Top 0.152: U3.18 73.31,58.96 arc-90 75.85,56.42 v75.85,50.95 | v32.15,41.38 arc-90 29.95,43.58 U$2.P23
  Route15 0.152: v75.85,50.95 arc-90 74.95,50.05 41.65,50.05 arc90 41.15,49.55 arc-90 40.8,49.2 33.4,49.2 arc90 32.4,48.2 32.4,45 arc90 33,44.4 arc-90 33.45,43.95 33.45,42.68 arc-90 v32.15,41.38
CLK_RAM  (via drill 0.35)
  Top 0.152: U7.38 72.81,30.9 arc-90 v72.73,30.98 | v38.2,28.75 arc90 37.95,28.5 U$2.P102
  Route15 0.152: v72.73,30.98 69.53,30.98 arc90 68.95,30.4 68.95,29.15 arc-90 68.5,28.7 38.25,28.7 arc-90 v38.2,28.75
CS  (via drill 0.35)
  Top 0.152: U7.19 68.7,29.3 arc-90 69.1,28.9 arc90 69.35,28.65 70.15,28.65 arc90 70.87,29.37 v70.87,29.49 | v36.34,26.62 arc-90 36.45,26.51 U$2.P99
  Route15 0.152: v70.87,29.49 70.87,27.17 arc-90 70.25,26.55 36.41,26.55 arc-90 v36.34,26.62
DATA_NES  (via drill 0.35)
  Top 0.152: v68,52.45 66.56,52.45 arc-90 U2.2
  Route2 0.152: v68,52.45 68,48.15 arc90 70.4,45.75 73.15,45.75 arc-90 74.85,44.05 74.85,8.99 arc-90 72.31,6.45 46.94,6.45 arc-90 44.4,8.99 U$3.DATA
DATA_NES_FPGA  (via drill 0.35)
  Top 0.152: U2.18 70.97,51.82 arc90 v70.7,51.55 | v32.15,43.2 arc-90 30.95,44.4 U$2.P21
  Route15 0.152: v70.7,51.55 40.75,51.55 arc90 40.45,51.25 arc-90 40.1,50.9 32,50.9 arc90 31.4,50.3 31.4,43.95 arc90 v32.15,43.2
DCLK  (via drill 0.35)
  Top 0.152: RN5.1 23.88,53.38 arc-90 v23.8,53.45 | v23.4,43.15 arc90 23.95,43.7 U$2.P35
  Bottom 0.152: v23.8,53.45 23.8,43.55 arc-90 v23.4,43.15
DCLK_GBA
  Top 0.152: U5.38 24.21,55.36 arc90 RN5.8
DOWN_BUTTON  (via drill 0.35)
  Top 0.152: U4.4 9.96,35.1 arc90 v10,35.15 | v25.8,36.35 arc-90 25.36,35.9 U$2.P50
  Bottom 0.152: v10,35.15 24.61,35.15 arc90 v25.8,36.35
DQ0  (via drill 0.35)
  Top 0.152: U7.2 64.7,42.9 arc90 v64.75,42.95 | v43.2,43.1 43.2,42.5 arc90 U$2.P144
  Route15 0.152: v64.75,42.95 43.35,42.95 arc-90 v43.2,43.1
DQ1  (via drill 0.35)
  Top 0.152: U7.4 64.51,41.3 arc90 v64.8,41.59 | v41.29,42.17 arc90 42.06,41.4 U$2.P142
  Route15 0.152: v64.8,41.59 41.87,41.59 arc-90 v41.29,42.17
DQ2  (via drill 0.35)
  Top 0.152: U7.5 61.99,40.5 arc-90 v61.95,40.54 | v39.95,40.95 arc90 40.49,40.4 U$2.P140
  Route15 0.152: v61.95,40.54 40.35,40.54 arc-90 v39.95,40.95
DQ3  (via drill 0.35)
  Top 0.152: U7.7 v61.9,38.9 | v38.56,39.76 arc90 38.92,39.4 U$2.P138
  Route15 0.152: v61.9,38.9 39.42,38.9 arc-90 v38.56,39.76
DQ4  (via drill 0.35)
  Top 0.152: U7.8 64.7,38.1 arc90 v64.85,38.25 | v36.35,37.95 arc90 36.9,37.4 U$2.P134
  Route15 0.152: v64.85,38.25 63.35,38.25 arc90 62.9,37.8 62.9,37.45 arc-90 62.5,37.05 37.25,37.05 arc-90 v36.35,37.95
DQ5  (via drill 0.35)
  Top 0.152: U7.10 v66.7,36.5 | v35.08,36.63 arc90 35.31,36.4 U$2.P132
  Route15 0.152: v66.7,36.5 arc-90 66,35.8 36.02,35.8 35.18,36.63 arc-90 v35.08,36.63
DQ6  (via drill 0.35)
  Top 0.152: U7.11 60.76,35.7 arc90 v59.65,34.59 | v33.81,34.71 arc90 34.62,33.9 U$2.P127
  Route15 0.152: v59.65,34.59 arc-90 59.31,34.25 41.6,34.25 arc90 41.35,34 arc-90 41.05,33.7 40.4,33.7 arc90 39.74,34.36 34.16,34.36 arc-90 v33.81,34.71
DQ7  (via drill 0.35)
  Top 0.152: U7.13 arc90 U7.13 65.55,34.09 v65.75,33.89 | v31.9,34.45 arc90 33.95,32.4 U$2.P124
  Route15 0.152: v65.75,33.89 arc90 65.59,34.05 61.45,34.05 arc90 60.9,33.5 60.9,33.25 arc-90 60.35,32.7 33.65,32.7 arc-90 v31.9,34.45
DQ8  (via drill 0.35)
  Top 0.152: U7.42 73.3,34.1 arc-90 v73.25,34.15 | v31.05,33.7 arc90 32.85,31.9 U$2.P123
  Route15 0.152: v73.25,34.15 66.85,34.15 arc90 66.5,33.8 66.5,33.45 arc-90 66.15,33.1 65.8,33.1 arc90 65.45,32.75 arc-90 65.2,32.5 64.25,32.5 arc-90 63.9,32.85 63.9,33.25 arc90 63.6,33.55 61.95,33.55 arc90 61.4,33 61.4,32.8 arc-90 60.75,32.15 32.6,32.15 arc-90 v31.05,33.7
DQ9  (via drill 0.35)
  Top 0.152: U7.44 arc-90 74.82,35.85 v76.15,35.85 | v32.8,34.95 arc90 34.35,33.4 U$2.P126
  Route15 0.152: v76.15,35.85 68.6,35.85 arc90 68,35.25 arc-90 67.25,34.5 60.8,34.5 arc90 60.35,34.05 arc-90 59.65,33.35 34.4,33.35 arc-90 v32.8,34.95
DQ10  (via drill 0.35)
  Top 0.152: U7.45 v73.3,36.5 | v34.4,36 arc90 34.5,35.9 U$2.P131
  Route15 0.152: v73.3,36.5 67.9,36.5 arc90 67.4,36 67.4,35.65 arc-90 67.15,35.4 35.25,35.4 34.65,36 arc-90 v34.4,36
DQ11  (via drill 0.35)
  Top 0.152: U7.47 v76.3,38.1 | v35.7,37.3 arc90 36.1,36.9 U$2.P133
  Route15 0.152: v76.3,38.1 66.45,38.1 arc90 65.85,37.5 65.85,36.85 arc-90 65.35,36.35 36.65,36.35 arc-90 v35.7,37.3
DQ12  (via drill 0.35)
  Top 0.152: U7.48 v73.35,38.9 | v37.87,39.17 arc90 38.14,38.9 U$2.P137
  Route15 0.152: v73.35,38.9 63,38.9 arc90 62.7,38.6 62.7,38.35 arc-90 62.3,37.95 39.09,37.95 arc-90 v37.87,39.17
DQ13  (via drill 0.35)
  Top 0.152: U7.50 arc-90 74.82,40.65 v76.05,40.65 | v39.28,40.33 arc90 39.71,39.9 U$2.P139
  Route15 0.152: v76.05,40.65 66,40.65 arc90 65.55,40.2 arc-90 65.05,39.7 39.91,39.7 arc-90 v39.28,40.33
DQ14  (via drill 0.35)
  Top 0.152: U7.51 v73.3,41.3 | v40.62,41.56 arc90 41.28,40.9 U$2.P141
  Route15 0.152: v73.3,41.3 65.6,41.3 arc90 65.35,41.05 65.35,40.95 arc-90 65.05,40.65 64.55,40.65 arc-90 64.2,41 arc90 64.05,41.15 41.03,41.15 arc-90 v40.62,41.56
DQ15  (via drill 0.35)
  Top 0.152: U7.53 v73.25,42.9 | v41.9,42.85 41.9,42.3 arc90 42.3,41.9 U$2.P143
  Route15 0.152: v73.25,42.9 65.75,42.9 arc90 65.5,42.65 65.5,42.4 arc-90 65.3,42.2 42.55,42.2 arc-90 v41.9,42.85
DQMH  (via drill 0.35)
  Top 0.152: U7.39 v73.3,31.7 | v39.4,30.19 arc-90 39.45,30.14 U$2.P105
  Route15 0.152: v73.3,31.7 67.8,31.7 arc90 67.3,31.2 67.3,30.85 arc-90 66.85,30.4 39.61,30.4 arc90 v39.4,30.19
DQML  (via drill 0.35)
  Top 0.152: U7.15 arc90 U7.15 v66.41,32.49 | v30.33,33.13 arc90 32.12,31.35 40.9,31.35 arc-90 41.4,30.85 41.4,27.15 arc90 42.15,26.4 U$2.P112
  Route15 0.152: v66.41,32.49 arc-90 65.41,31.5 31.96,31.5 arc-90 v30.33,33.13
FLASH_CS  (via drill 0.35)
  Top 0.152: R5.1 9.8,11.48 arc-90 U1.1 11.14,13.61 arc-90 v10.55,14.2 | v22.75,41.9 U$2.P38
  Route15 0.152: v10.55,14.2 10.95,14.6 10.95,38.66 arc-90 13.09,40.8 21.65,40.8 arc90 v22.75,41.9
FLASH_D0  (via drill 0.35)
  Top 0.152: U1.5 6.9,17.41 arc-90 v7.46,16.85 | v29.8,29.29 arc-90 29.41,28.9 U$2.P64
  Route2 0.152: v7.46,16.85 7.46,21.76 arc-90 9.05,23.35 10.2,23.35 arc90 11.6,24.75 11.6,28.4 arc-90 12.3,29.1 14.4,29.1 arc90 15,29.7 arc-90 15.4,30.1 28.99,30.1 arc-90 v29.8,29.29
FLASH_D1  (via drill 0.35)
  Top 0.152: U1.2 8.18,14.88 arc-90 v8.1,14.95 | v29.2,28.29 arc90 29.09,28.4 U$2.P65
  Route2 0.152: v8.1,14.95 8.1,21.65 arc-90 9.15,22.7 10.6,22.7 arc90 12.1,24.2 12.1,28.05 arc-90 12.7,28.65 14.7,28.65 arc90 15.4,29.35 arc-90 15.8,29.75 27.74,29.75 arc-90 v29.2,28.29
FLASH_D2  (via drill 0.35)
  Top 0.152: v6.86,16.15 arc90 v6.86,16.14 U1.3 13.05,16.14 arc-90 13.6,15.6 13.6,12.45 12.25,11.1 arc-90 R6.2 | v30.21,30.5 arc-90 29.61,29.9 U$2.P62
  Route2 0.152: v30.21,30.5 arc-90 30.16,30.45 15.05,30.45 arc90 14.65,30.05 arc-90 14.15,29.55 12.2,29.55 arc90 11.1,28.45 11.1,24.85 arc-90 10.15,23.9 9.15,23.9 arc90 6.86,21.61 v6.86,16.15
FLASH_D3  (via drill 0.35)
  Top 0.152: U1.7 6.17,14.88 arc-90 v6.25,14.8 6.25,12.33 arc90 R7.2 | v29.51,31.09 arc-90 28.82,30.4 U$2.P61
  Route2 0.152: v6.25,14.8 6.25,27.46 arc-90 8.79,30 13.85,30 arc90 14.3,30.45 arc-90 14.7,30.85 29.27,30.85 arc90 v29.51,31.09
G1  (via drill 0.35)
  Top 0.152: RN3.3 33.65,52.62 arc90 v34.34,51.92 | v35.74,40.3 arc90 35.95,40.51 U$2.P11
  Bottom 0.152: v34.34,51.92 34.34,50.71 arc90 35.15,49.9 arc-90 35.8,49.25 35.8,40.36 arc-90 v35.74,40.3
G1_GBA  (via drill 0.35)
  Top 0.152: U5.24 v31.2,59.55 arc-90 v31.2,59.55 | v33.23,55.88 arc-90 33.65,55.45 RN3.6
  Bottom 0.152: v31.2,59.55 31.2,57.9 arc90 v33.23,55.88
G2  (via drill 0.35)
  Top 0.152: RN3.2 32.85,52.64 arc90 v33.04,52.45 | v35.05,40.9 arc90 35.45,41.29 U$2.P12
  Bottom 0.152: v33.04,52.45 33.04,51.96 arc90 33.8,51.2 arc-90 34,51 34,50.3 arc90 34.85,49.45 arc-90 35.35,48.95 35.35,41.19 arc-90 v35.05,40.9
G2_GBA
  Top 0.152: U5.25 30.69,56.81 arc90 30.95,56.55 arc-90 31.85,55.65 arc90 32.15,55.35 32.3,55.35 arc-90 32.85,54.8 RN3.7
G3  (via drill 0.35)
  Top 0.152: RN3.1 32.05,52.23 arc90 v32.13,52.15 | v34.25,42.4 arc90 34.45,42.6 U$2.P14
  Bottom 0.152: v32.13,52.15 32.13,50.87 arc90 33.9,49.1 arc-90 34.45,48.55 34.45,42.6 arc-90 v34.25,42.4
G3_GBA
  Top 0.152: U5.26 30.21,56.54 arc90 30.55,56.2 arc-90 31.4,55.35 31.4,55.25 arc90 31.98,54.67 RN3.8
G4  (via drill 0.35)
  Top 0.152: RN4.4 arc90 30.71,53.18 v30.71,50.95 | v27.59,38.27 arc90 28.45,39.13 U$2.P26
  Bottom 0.152: v30.71,50.95 30.71,48.61 arc-90 29.2,47.1 28.6,47.1 arc90 27.65,46.15 27.65,38.33 arc-90 v27.59,38.27
G4_GBA
  Top 0.152: U5.27 29.7,56.2 arc90 29.9,56 arc-90 30.9,55 RN4.5
G5  (via drill 0.35)
  Top 0.152: RN4.3 30.1,51.23 arc-90 v29.7,50.83 | v26.98,38.94 arc90 27.95,39.91 U$2.P27
  Bottom 0.152: v29.7,50.83 arc-90 28.52,49.65 28.15,49.65 arc90 27.25,48.75 27.25,39.22 arc-90 v26.98,38.94
G5_GBA
  Top 0.152: U5.28 29.19,55.91 arc90 29.4,55.7 arc-90 30.1,55 RN4.6
GND  (via drill 0.35)
  Top 0.152: U$2.P108 40.95,22.1 arc90 41.7,21.35 55.7,21.35 arc-90 57.75,19.3 57.75,17.65 arc90 v57.9,17.5
  other vias: 51.45,49 51.45,46.5 54.55,48.95 54.55,46.35 31.8,27.45 31.8,25.3 40.15,46.4 9.75,41.6 13.75,19.85 15.25,3.4 21.4,3.25 27.55,3.4 24.25,10.8 30.65,10.7 37.25,10.95 35.75,3.2 43.45,10.8 42.95,3.45 50.75,10.9 51.05,3.5 72.45,11.9 72.25,3.7 77.85,12.05 57.8,3.5 58.15,11.1 46.8,48.55 46.8,45.1 58.1,48.75 63.7,48.6 77.5,54.45 78.1,48.5 45.15,53.95 21.75,53.85 5.4,58.5 5.75,56.4
  pour Top: -4.8,69.75 87.8,69.75 87.8,-1.25 -4.8,-1.25
  pour Bottom: -3.75,69.45 87.55,69.45 87.55,-2.25 -3.75,-2.25
L_BUTTON  (via drill 0.35)
  Top 0.152: U4.1 9.85,38.1 arc90 v10.05,38.3 | v22.75,38.55 arc-90 22.1,37.9 U$2.P46
  Bottom 0.152: v10.05,38.3 arc90 10.4,37.95 22.35,37.95 arc90 22.75,38.35 v22.75,38.55
LATCH_NES  (via drill 0.35)
  Top 0.152: v63.75,58.8 arc-90 63.91,58.96 U3.3
  Route2 0.152: v63.75,58.8 63.75,53.35 arc-90 63.3,52.9 arc90 60.9,50.5 60.9,18.44 arc-90 58.36,15.9 arc-90 58.31,15.85 55.65,15.85 arc90 54.5,14.7 54.5,13.85 arc-90 52.6,11.95 50,11.95 arc-90 48.4,13.55 U$3.LATCH
LATCH_NES_FPGA  (via drill 0.35)
  Top 0.152: U3.17 73.11,58.3 arc-90 75.1,56.3 75.1,51.2 arc-90 v74.85,50.95 | v32.2,42.29 arc-90 30.45,44.04 U$2.P22
  Route15 0.152: v74.85,50.95 arc-90 74.65,50.75 41,50.75 arc90 40.7,50.45 arc-90 40.35,50.1 32.65,50.1 arc90 31.95,49.4 31.95,44.6 arc90 32.65,43.9 arc-90 32.95,43.6 32.95,42.9 arc-90 32.34,42.29 v32.2,42.29
LEFT_BUTTON  (via drill 0.35)
  Top 0.152: U4.3 arc-90 8.4,36.15 v10,36.15 | v24.14,37.37 arc-90 23.67,36.9 U$2.P48
  Bottom 0.152: v10,36.15 22.92,36.15 arc90 v24.14,37.37
MISO/TDO
  Top 0.152: U$2.P106 39.95,20.9 arc90 40.35,20.5 53.01,20.5 arc-90 54.8,18.71 54.8,13.65 arc90 55.81,12.64 PROG2.1
MOSI/TDI
  Top 0.152: U$2.P110 55.91,25.4 arc-90 58.45,22.86 58.45,21.55 arc90 59.35,20.65 64.36,20.65 arc-90 66.9,18.11 66.9,16.25 arc90 68.8,14.35 arc-90 70.35,12.8 70.35,9.4 arc-90 69.25,8.3 68.01,8.3 arc-90 PROG2.4
N$1
  Top 0.152: U$2.P39 17.95,41.4 arc-90 R1.2
N$2
  Top 0.152: U$2.P37 18.65,42.4 arc-90 18.2,42.85 18.2,43.35 arc90 C24.1 R2.2
N$3  (via drill 0.35)
  Top 0.152: v13.3,64.7 13.3,63.4 U$5.CC1 | v6.95,44.19 arc-90 7.56,44.8 R3.1
  Route15 0.152: v13.3,64.7 13.3,46.68 arc-90 10.81,44.19 v6.95,44.19
N$4  (via drill 0.35)
  Top 0.152: U$1.3 19.9,22.05 arc90 v19.45,22.5 | v13.3,34.45 13.3,33.91 arc90 R8.1
  Route15 0.152: v19.45,22.5 15.84,22.5 arc-90 13.3,25.04 v13.3,34.45
N$5  (via drill 0.35)
  Top 0.152: 12.2,63.37 arc-90 12.27,63.3 | v6.2,44.8 5.25,44.8 arc-90 R9.1 | U$5.CC2 12.27,63.3 | 12.2,63.37 v12.2,64.7 | 12.2,63.37 arc-90 12.27,63.3
  Route15 0.152: v12.2,64.7 12.2,47.29 arc-90 9.71,44.8 v6.2,44.8
N$6  (via drill 0.35)
  Top 0.152: R10.2 13.05,27.19 arc-90 v13.91,28.04 | v24.9,27.29 arc90 24.79,27.4 U$2.P67
  Bottom 0.152: v13.91,28.04 arc90 14.35,27.6 24.59,27.6 arc-90 v24.9,27.29
N$7  (via drill 0.35)
  Top 0.152: R11.2 13.05,22.7 arc90 v13.15,22.6 | v24.4,25.05 arc90 24.45,25 U$2.P75
  Bottom 0.152: v13.15,22.6 arc90 14.1,21.65 22.36,21.65 arc90 24.4,23.69 v24.4,25.05
N$9  (via drill 0.35)
  Top 0.406: Q1.2 8.63,58.77 arc-90 R14.1 9.6,56.75 arc-90 v9.3,56.45
  Bottom 0.406: v9.3,56.45 7.9,56.45 arc90 6.6,55.15 6.6,48.95 arc-90 5.3,47.65 4.74,47.65 arc90 2.2,45.11 2.2,8.6 arc90 3.85,6.95 7.85,6.95 arc-90 9.2,5.6 9.2,3 arc-90 S1.2
N$11
  Top 0.406: R13.2 R12.1 arc-90 9.76,61.3 Q1.4 5,61.3 arc-90 4.55,61.75 arc90 3.95,62.35 1.65,62.35 arc90 0.85,61.55 0.85,59.75 arc90 1.83,58.77 Q1.7 Q1.8
N$12  (via drill 0.35)
  Top 0.406: S1.3 13.5,8.65 arc-90 C20.1 arc90 14.65,9.4 v15.4,10.15 | R13.1 11.75,59.8 arc-90 v10.95,60.6
  Bottom 0.406: v10.95,60.6 10.95,56.15 arc-90 9.8,55 arc90 8.7,53.9 8.7,48.34 arc-90 6.16,45.8 5.55,45.8 arc90 4.05,44.3 4.05,10 arc90 5.55,8.5 13.75,8.5 arc90 v15.4,10.15
N$19
  Top 0.152: U$2.P71 18.35,25.4 arc90 R4.1 17.5,22.75 arc-90 LED1.A
N$20
  Top 0.254: U$2.P1 40.95,47.7 R15.2 42.85,49.6 LED2.A
OSC_OUT
  Top 0.152: R8.2 17.79,31.39 arc90 19.05,32.65 arc-90 19.8,33.4 U$2.P55
R1  (via drill 0.35)
  Top 0.152: RN4.2 29.3,51.82 arc-90 v28.43,50.95 | v26.3,39.55 arc90 26.95,40.2 U$2.P29
  Bottom 0.152: v28.43,50.95 arc-90 27.63,50.15 27.5,50.15 arc90 26.85,49.5 26.85,40.1 arc-90 v26.3,39.55
R1_GBA
  Top 0.152: U5.29 28.71,55.74 arc90 29,55.45 arc-90 29.3,55.15 RN4.7
R2  (via drill 0.35)
  Top 0.152: RN4.1 28.5,52.47 arc-90 v27.08,51.04 | v25.65,40.22 arc90 26.45,41.02 U$2.P30
  Bottom 0.152: v27.08,51.04 arc90 26.45,50.42 26.45,41.02 arc-90 v25.65,40.22
R2_GBA
  Top 0.152: U5.30 28.2,54.92 arc90 RN4.8
R3  (via drill 0.35)
  Top 0.152: RN5.4 27.35,52.67 arc-90 v26.01,51.34 | v24.93,40.82 arc90 25.45,41.34 U$2.P32
  Bottom 0.152: v26.01,51.34 26.01,41.91 arc-90 v24.93,40.82
R3_GBA
  Top 0.152: U5.31 27.69,56.64 arc-90 27.45,56.4 arc90 27.35,56.3 RN5.5
R4  (via drill 0.35)
  Top 0.152: RN5.3 26.55,53.16 arc-90 v25.2,51.8 | v24.41,41.59 arc90 24.95,42.13 U$2.P33
  Bottom 0.152: v25.2,51.8 25.2,42.38 arc-90 v24.41,41.59
R4_GBA
  Top 0.152: U5.32 27.21,56.96 arc-90 26.8,56.55 arc90 26.55,56.3 RN5.6
R5  (via drill 0.35)
  Top 0.152: RN5.2 25.75,53.3 arc-90 24.9,52.45 24.56,52.45 arc90 v24.41,52.3 | v23.89,42.36 arc90 24.45,42.91 U$2.P34
  Bottom 0.152: v24.41,52.3 24.41,42.87 arc-90 v23.89,42.36
R5_GBA
  Top 0.152: U5.33 26.7,57.35 arc-90 26.2,56.85 arc90 25.75,56.4 RN5.7
R_BUTTON  (via drill 0.35)
  Top 0.152: U4.10 9.96,29.11 arc90 v10,29.15 | v28.95,33.75 arc-90 27.1,31.9 U$2.P58
  Bottom 0.152: v10,29.15 10,30.55 arc-90 11,31.55 26.75,31.55 arc90 v28.95,33.75
RAS  (via drill 0.35)
  Top 0.152: U7.18 69.25,30.1 arc-90 v69.56,29.79 | v37.34,28.15 arc-90 37.45,28.04 U$2.P101
  Route15 0.152: v69.56,29.79 69.56,28.56 arc-90 69.05,28.05 37.44,28.05 arc-90 v37.34,28.15
RIGHT_BUTTON  (via drill 0.35)
  Top 0.152: U4.5 9.96,34.09 arc-90 v10,34.05 | v26.71,36.35 arc-90 25.76,35.4 U$2.P51
  Bottom 0.152: v10,34.05 arc90 10.3,33.75 24.17,33.75 arc90 26.71,36.29 v26.71,36.35
SCK/TCK
  Top 0.152: U$2.P109 54.16,24.9 arc-90 58,21.06 58,21.1 arc90 59.1,20 63.35,20 arc-90 66.15,17.2 66.15,12.7 arc90 PROG2.3
SELECT_BUTTON  (via drill 0.35)
  Top 0.152: U4.6 9.96,33.1 arc90 v10,33.14 | v27.6,35.05 27.6,34.54 arc-90 25.96,32.9 U$2.P56
  Bottom 0.152: v10,33.14 25.96,33.14 arc90 27.6,34.78 v27.6,35.05
SO1
  Top 0.152: U4.13 11.31,26.09 arc-90 R10.1
SO2
  Top 0.152: U4.14 10.1,25.1 arc-90 R11.1
SPL  (via drill 0.35)
  Top 0.152: U$2.P2 40.45,43.58 arc90 v40.61,43.42 | v40.5,52.16 arc-90 39.95,52.71 RN1.6
  Bottom 0.152: v40.61,43.42 arc90 41,43.81 41,51.66 arc90 v40.5,52.16
SPL_GBA  (via drill 0.35)
  Top 0.152: U5.17 34.7,58.95 arc-90 35.05,59.3 arc90 35.35,59.6 35.35,59.7 arc-90 36.1,60.45 36.98,60.45 arc-90 v37.16,60.27 | v40.01,55.95 40.01,54.73 arc-90 RN1.3
  Bottom 0.152: v37.16,60.27 37.47,60.27 arc-90 40.01,57.73 v40.01,55.95
SPS  (via drill 0.35)
  Top 0.152: RN1.5 39.15,52 arc-90 v39.1,51.95 | v39.7,43.2 arc-90 38.95,43.95 U$2.P5
  Bottom 0.152: v39.1,51.95 39.1,43.8 arc90 v39.7,43.2
SPS_GBA  (via drill 0.35)
  Top 0.152: U5.15 35.69,59.09 arc-90 v36.3,59.7 | v39.1,56.05 arc-90 39.15,56 RN1.4
  Bottom 0.152: v36.3,59.7 36.66,59.7 arc-90 39.1,57.26 v39.1,56.05
SS/TMS
  Top 0.152: U$2.P107 40.45,21.55 arc90 41.1,20.9 55.56,20.9 arc-90 57.15,19.31 57.15,16.9 arc90 59.6,14.45 63.6,14.45 arc-90 64.9,13.15 64.9,11.95 arc90 65.45,11.4 68.5,11.4 arc90 68.85,11.75 68.85,12.54 arc90 PROG2.5
START_BUTTON  (via drill 0.35)
  Top 0.152: U4.7 v9.94,32.11 arc-90 v9.95,32.1 | v28.27,34.43 arc-90 26.23,32.4 U$2.P57
  Bottom 0.152: v9.95,32.1 10.4,32.55 26.39,32.55 arc90 v28.27,34.43
TMDSCLK_N
  Top 0.152: U$2.P114 44.41,27.4 44.5,27.5 51.68,27.5 55.51,31.32 55.51,40.35 arc-90 55.77,40.62 arc90 56.34,41.19 56.34,42.68 arc90 55.77,43.25 arc-90 55.51,43.52 55.51,50.65 55.54,50.69 D2.5 D2.6 55.54,52.79 55.44,52.89 55.44,58.4 55.72,58.68 J1.P$12
TMDSCLK_P
  Top 0.152: U$2.P115 44.41,27.9 44.5,27.8 51.55,27.8 55.2,31.45 55.2,40.35 arc-90 55.77,40.92 arc90 56.04,41.19 56.04,42.68 arc90 55.77,42.95 arc-90 55.2,43.52 55.2,50.7 55.04,50.86 D2.4 D2.7 55.04,52.79 55.14,52.89 55.14,58.35 54.72,58.77 J1.P$10
TMDSD0_N
  Top 0.152: U$2.P116 44.41,28.4 44.5,28.5 49.93,28.5 53.91,32.47 53.91,40.27 arc-90 54.17,40.53 arc90 54.74,41.11 54.74,44.26 arc90 54.17,44.83 arc-90 53.91,45.1 53.91,50.65 54.04,50.78 D2.2 D2.9 54.04,52.79 53.94,52.89 53.94,58.35 54.22,58.63 J1.P$9
TMDSD0_P
  Top 0.152: U$2.P117 44.41,28.9 44.5,28.8 49.8,28.8 53.6,32.6 53.6,40.27 arc-90 54.17,40.84 arc90 54.44,41.11 54.44,44.26 arc90 54.17,44.53 arc-90 53.6,45.1 53.6,50.65 53.54,50.71 D2.1 D2.10 53.54,52.79 53.64,52.89 53.64,58.3 53.22,58.72 J1.P$7
TMDSD1_N
  Top 0.152: U$2.P118 44.41,29.4 44.5,29.5 48.93,29.5 52.41,32.97 52.41,35.05 arc-90 52.67,35.32 arc90 53.24,35.89 53.24,36.25 arc90 52.67,36.83 52.07,36.83 arc-90 51.81,37.09 51.81,37.46 arc-90 52.07,37.73 52.67,37.73 arc90 53.24,38.3 53.24,38.66 arc90 52.67,39.23 arc-90 52.41,39.5 52.41,50.65 52.47,50.72 D1.5 D1.6 52.47,52.78 52.37,52.88 52.37,58.35 52.72,58.7 J1.P$6
TMDSD1_P
  Top 0.152: U$2.P119 44.41,29.9 44.5,29.8 48.8,29.8 52.1,33.1 52.1,35.05 arc-90 52.67,35.62 arc90 52.94,35.89 52.94,36.25 arc90 52.67,36.52 51.83,36.52 arc-90 51.26,37.09 51.26,37.46 arc-90 51.83,38.03 52.67,38.03 arc90 52.94,38.3 52.94,38.66 arc90 52.67,38.93 arc-90 52.1,39.5 52.1,50.65 51.97,50.78 D1.4 D1.7 51.97,52.78 52.07,52.88 52.07,58.4 51.72,58.75 J1.P$4
TMDSD2_N
  Top 0.152: U$2.P120 44.41,30.4 44.5,30.5 48.33,30.5 50.8,32.97 50.8,39.55 arc-90 51.07,39.82 arc90 51.64,40.39 51.64,40.63 arc90 51.07,41.2 50.51,41.2 arc-90 50.25,41.47 50.25,41.71 arc-90 50.51,41.98 51.07,41.98 arc90 51.64,42.55 51.64,42.79 arc90 51.07,43.36 arc-90 50.8,43.63 50.8,50.6 50.97,50.77 D1.2 D1.9 50.97,52.78 50.87,52.88 50.87,58.2 51.22,58.55 J1.P$3
TMDSD2_P
  Top 0.152: U$2.P121 44.41,30.9 44.5,30.8 48.2,30.8 50.5,33.1 50.5,39.55 arc-90 51.07,40.12 arc90 51.34,40.39 51.34,40.63 arc90 51.07,40.9 50.23,40.9 arc-90 49.66,41.47 49.66,41.71 arc-90 50.23,42.28 51.07,42.28 arc90 51.34,42.55 51.34,42.79 arc90 51.07,43.05 arc-90 50.5,43.63 50.5,50.6 50.47,50.63 D1.1 D1.10 50.47,52.78 50.57,52.88 50.57,58.3 50.22,58.65 J1.P$1
UP_BUTTON  (via drill 0.35)
  Top 0.152: U4.2 9.96,37.11 arc90 v10.05,37.2 | v23.42,37.93 arc-90 22.89,37.4 U$2.P47
  Bottom 0.152: v10.05,37.2 22.68,37.2 arc90 v23.42,37.93
WE  (via drill 0.35)
  Top 0.152: U7.16 66.62,31.7 arc-90 v66.74,31.58 | v29.59,32.59 arc90 31.38,30.8 40.2,30.8 arc-90 40.85,30.15 40.85,26.85 arc90 41.75,25.95 43.25,25.95 arc-90 U$2.P111
  Route15 0.152: v66.74,31.58 arc-90 66.05,30.9 31.28,30.9 arc-90 v29.59,32.59

## Text on the board
tPlace: SS | MISO | SCK | VREF | MOSI | GND